# Allegro board fmc_tlu_v1_17.brd
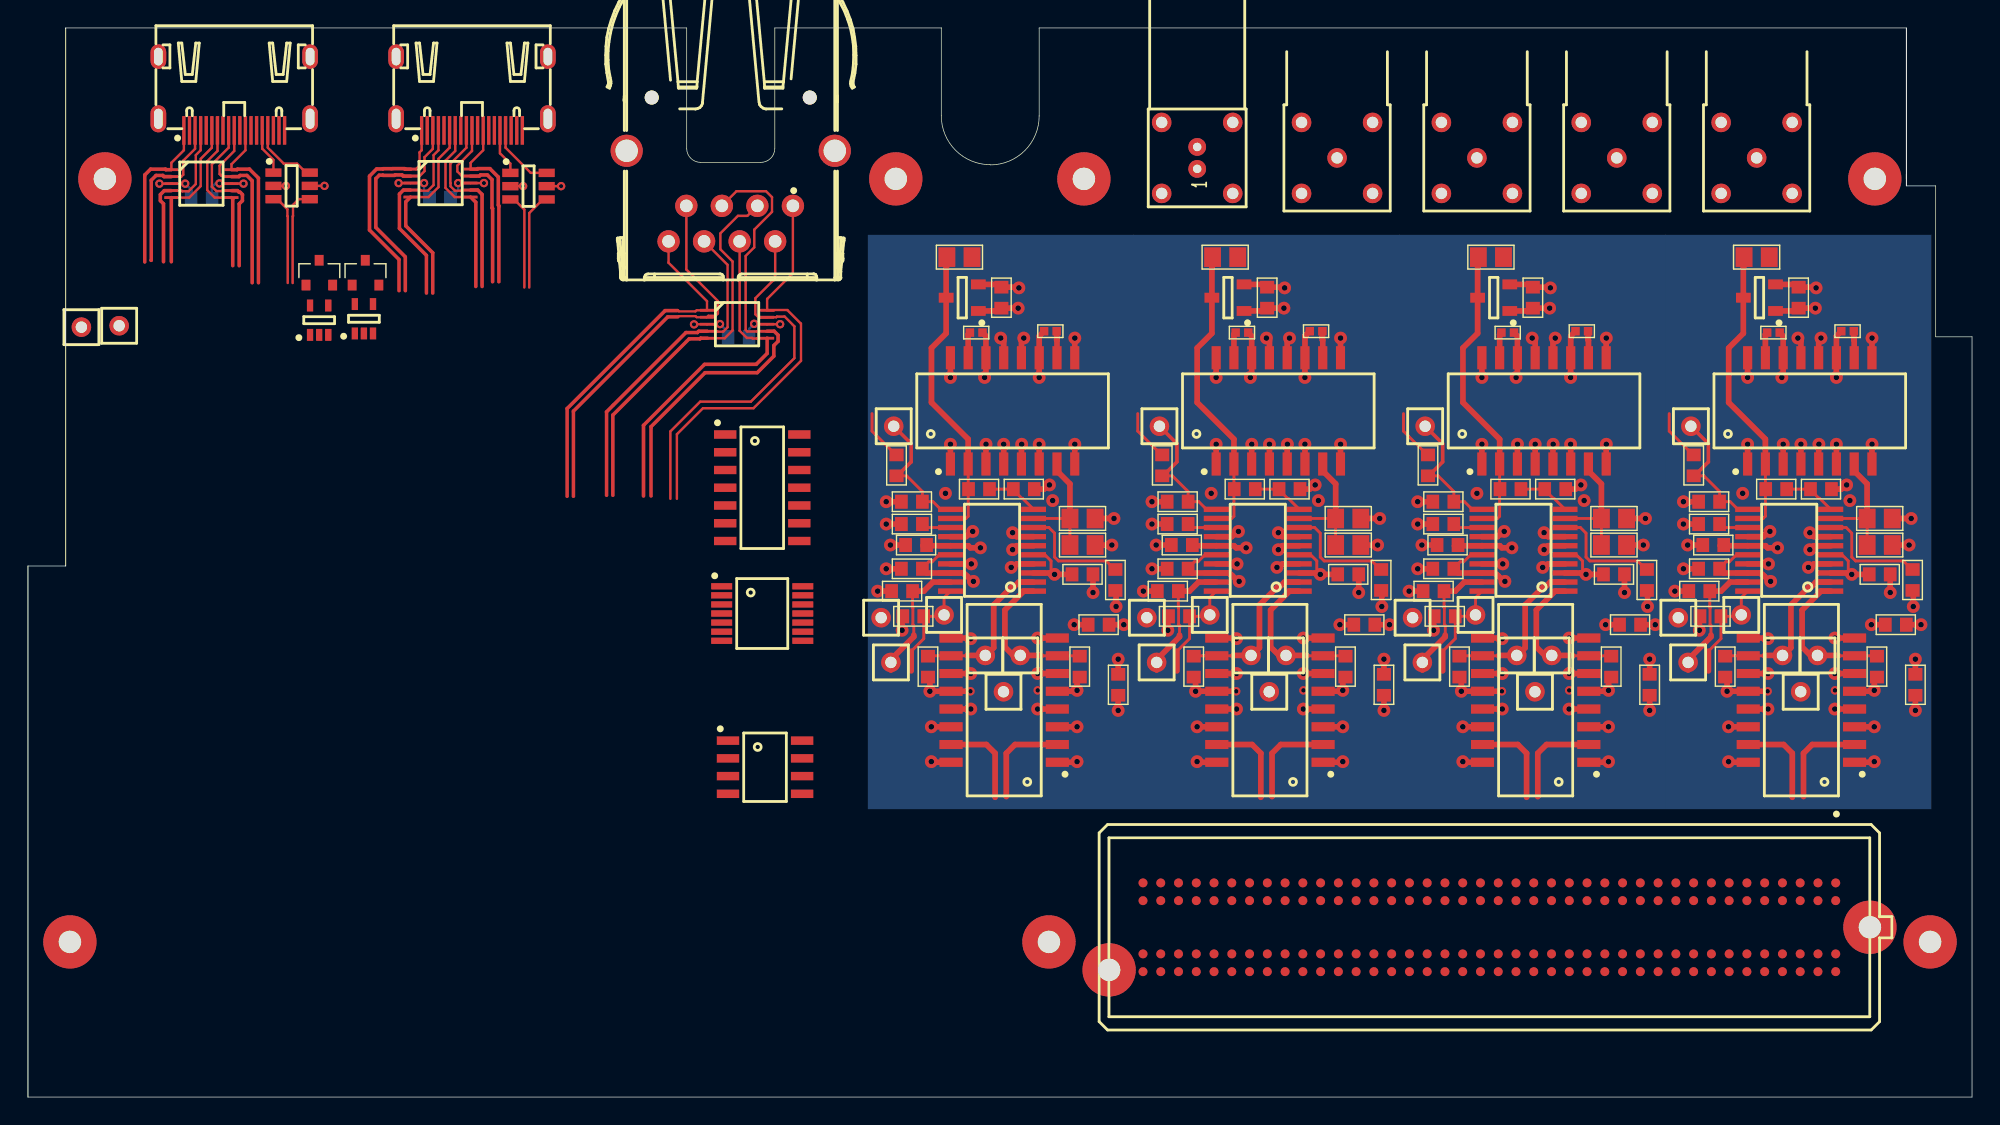
[diagram p0: board, top side]
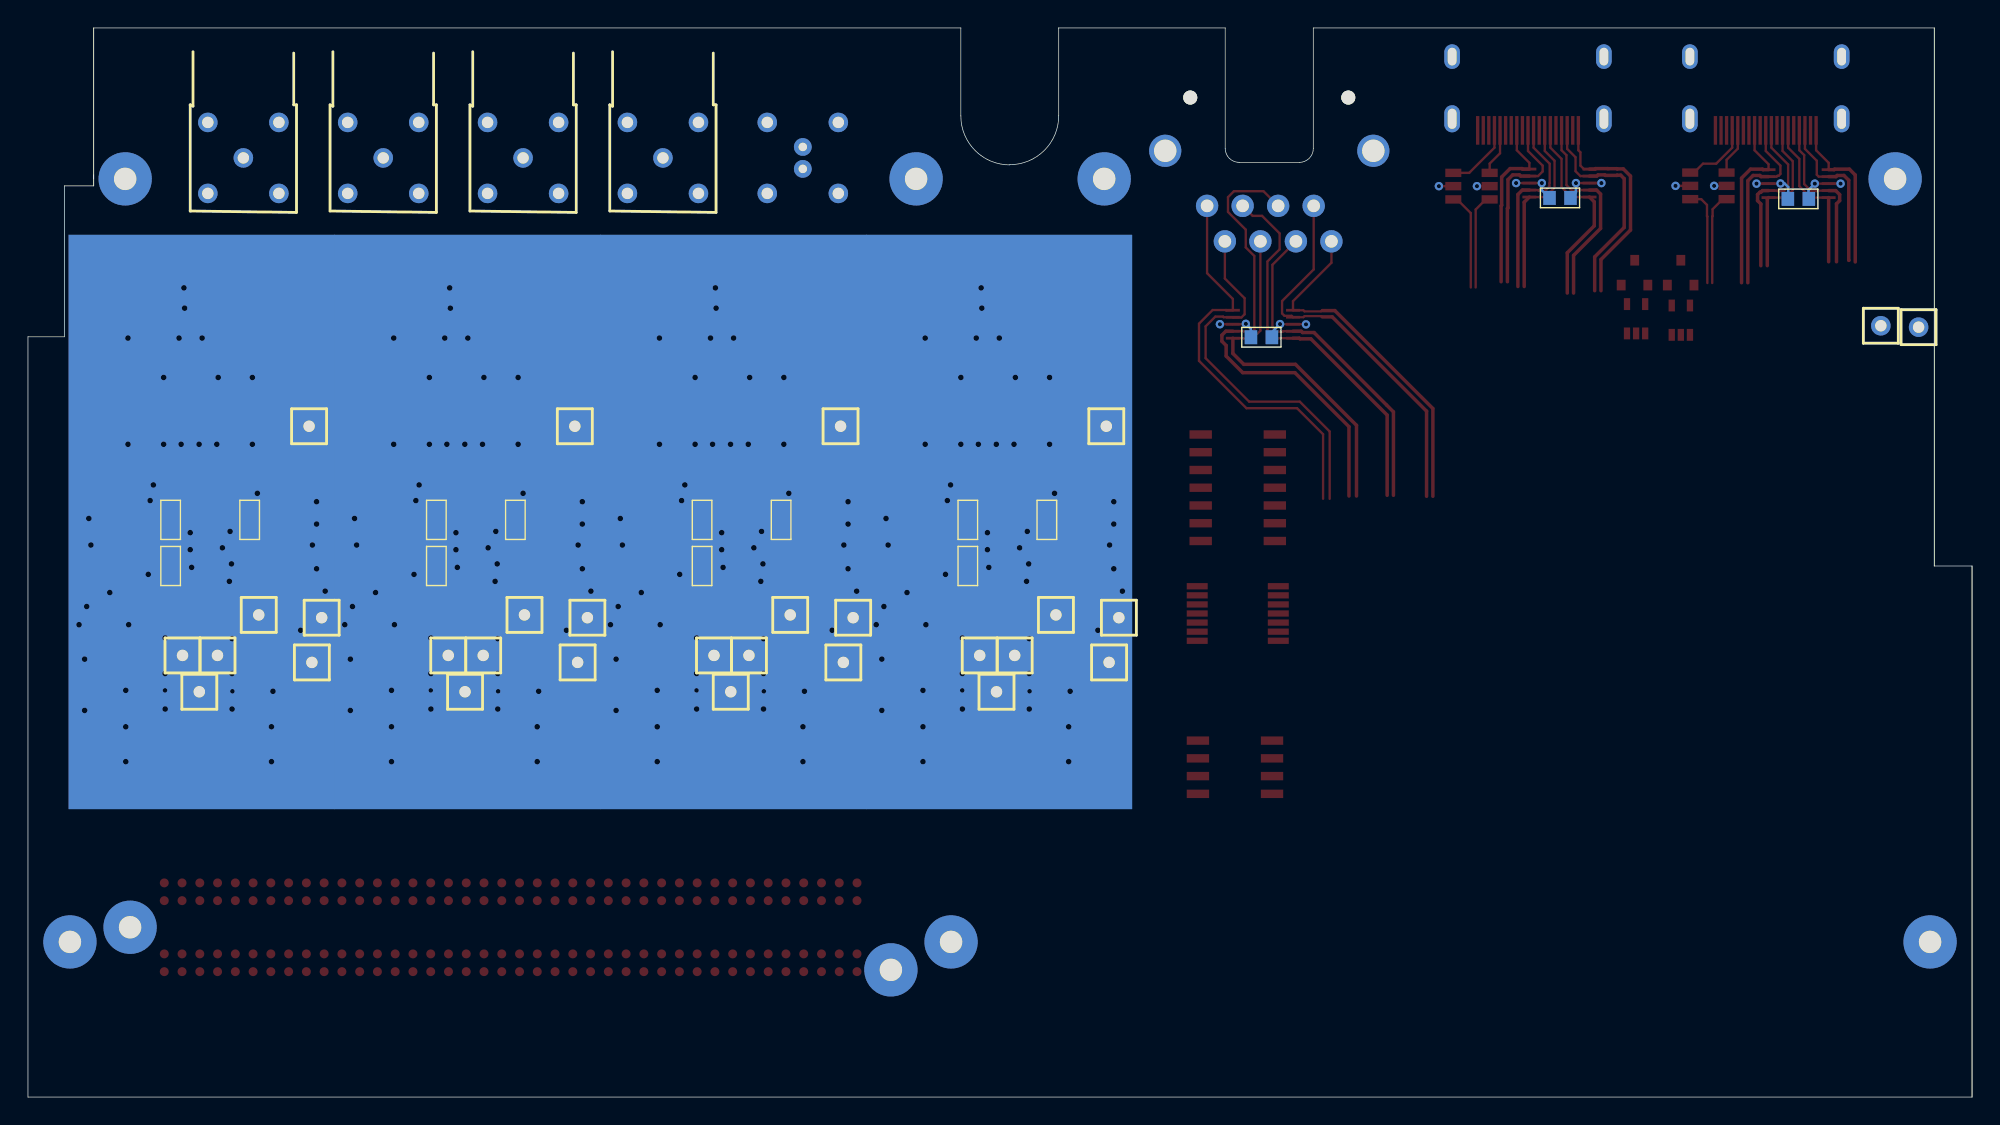
[diagram p1: board, bottom side, seen from below]

Outline 139 x 76.5 mm; copper layers: TOP, LAYER2, LAYER3, LAYER4, LAYER5, BOTTOM. Coordinates in mm from the lower left corner of the outline.
Outline path: 0,38 0,0 ; 0,38 2.7,38 ; 0,38 0,0 ; 0,0 139,0 139,54.4 136.4,54.4 136.4,65.2 134.3,65.2 ; 2.7,38 2.7,76.5 ; 2.7,38 2.7,76.5 ; 2.7,76.5 47.1,76.5 47.1,67.88 arc(47.39,67.17) 48.1,66.88 52.4,66.88 arc(53.1,67.17) 53.4,67.88 53.4,76.5 65.3,76.5 65.3,70.21 arc(66.33,67.74) 68.81,66.72 ; 134.3,76.5 72.3,76.5 72.3,70.2 arc(71.27,67.73) 68.8,66.7 ; 134.3,76.5 134.3,65.7 ; 134.3,76.5 134.3,65.2 ; 134.3,65.2 134.3,66

## Design rules (mm)
constraint set DEFAULT: min track width 0.17, pair gap 0.18
net group BEAM_TRIGGER0: nets BEAM_TRIGGER*<0> BEAM_TRIGGER<0>
net group BEAM_TRIGGER1: nets BEAM_TRIGGER*<1> BEAM_TRIGGER<1>
net group BEAM_TRIGGER2: nets BEAM_TRIGGER*<2> BEAM_TRIGGER<2>
net group BEAM_TRIGGER3: nets BEAM_TRIGGER*<3> BEAM_TRIGGER<3>
net group BEAM_TRIGGER_CFD0: nets BEAM_TRIGGER_CFD*<0> BEAM_TRIGGER_CFD<0>
net group BEAM_TRIGGER_CFD1: nets BEAM_TRIGGER_CFD*<1> BEAM_TRIGGER_CFD<1>
net group BEAM_TRIGGER_CFD2: nets BEAM_TRIGGER_CFD*<2> BEAM_TRIGGER_CFD<2>
net group BEAM_TRIGGER_CFD3: nets BEAM_TRIGGER_CFD*<3> BEAM_TRIGGER_CFD<3>
net group BUSY0: nets BUSY0 BUSY0*
net group BUSY1: nets BUSY1 BUSY1*
net group BUSY2: nets BUSY2 BUSY2*
net group CLK1: nets CLK1 CLK1*
net group CLK2: nets CLK2 CLK2*
net group CONT0: nets CONT0 CONT0*
net group CONT1: nets CONT1 CONT1*
net group CONT2: nets CONT2 CONT2*
net group DP0_C2M: nets DP0_C2M DP0_C2M*
net group DP0_M2C: nets DP0_M2C DP0_M2C*
net group DUT_CLK0: nets DUT_CLK0 DUT_CLK0*
net group FMC_CLK1_M2C: nets FMC_CLK1_M2C FMC_CLK1_M2C*
net group FMC_LA0: nets FMC_LA*<0> FMC_LA<0>
net group FMC_LA1: nets FMC_LA*<1> FMC_LA<1>
net group FMC_LA2: nets FMC_LA*<2> FMC_LA<2>
net group FMC_LA3: nets FMC_LA*<3> FMC_LA<3>
net group FMC_LA4: nets FMC_LA*<4> FMC_LA<4>
net group FMC_LA5: nets FMC_LA*<5> FMC_LA<5>
net group FMC_LA6: nets FMC_LA*<6> FMC_LA<6>
net group FMC_LA7: nets FMC_LA*<7> FMC_LA<7>
net group FMC_LA8: nets FMC_LA*<8> FMC_LA<8>
net group FMC_LA9: nets FMC_LA*<9> FMC_LA<9>
net group FMC_LA10: nets FMC_LA*<10> FMC_LA<10>
net group FMC_LA11: nets FMC_LA*<11> FMC_LA<11>
net group FMC_LA12: nets FMC_LA*<12> FMC_LA<12>
net group FMC_LA13: nets FMC_LA*<13> FMC_LA<13>
net group FMC_LA14: nets FMC_LA*<14> FMC_LA<14>
net group FMC_LA15: nets FMC_LA*<15> FMC_LA<15>
net group FMC_LA16: nets FMC_LA*<16> FMC_LA<16>
net group FMC_LA17: nets FMC_LA*<17> FMC_LA<17>
net group FMC_LA18: nets FMC_LA*<18> FMC_LA<18>
net group FMC_LA19: nets FMC_LA*<19> FMC_LA<19>
net group FMC_LA20: nets FMC_LA*<20> FMC_LA<20>
net group FMC_LA21: nets FMC_LA*<21> FMC_LA<21>
net group FMC_LA22: nets FMC_LA*<22> FMC_LA<22>
net group FMC_LA23: nets FMC_LA*<23> FMC_LA<23>
net group FMC_LA24: nets FMC_LA*<24> FMC_LA<24>
net group FMC_LA25: nets FMC_LA*<25> FMC_LA<25>
net group FMC_LA26: nets FMC_LA*<26> FMC_LA<26>
net group FMC_LA27: nets FMC_LA*<27> FMC_LA<27>
net group FMC_LA28: nets FMC_LA*<28> FMC_LA<28>
net group FMC_LA29: nets FMC_LA*<29> FMC_LA<29>
net group FMC_LA30: nets FMC_LA*<30> FMC_LA<30>
net group FMC_LA31: nets FMC_LA*<31> FMC_LA<31>
net group FMC_LA32: nets FMC_LA*<32> FMC_LA<32>
net group FMC_LA33: nets FMC_LA*<33> FMC_LA<33>
net group GBTCLK0_M2C: nets GBTCLK0_M2C GBTCLK0_M2C*
net group SPARE1: nets SPARE1 SPARE1*
net group SPARE2: nets SPARE2 SPARE2*
net group TRIG0: nets TRIG0 TRIG0*
net group TRIG1: nets TRIG1 TRIG1*
net group TRIG2: nets TRIG2 TRIG2*
net group IN: nets IN<0> IN<1> IN<2> IN<3>
net group VTHRESH: nets VTHRESH<0> VTHRESH<1> VTHRESH<2> VTHRESH<3>

## Placement (name value [footprint] x y rotation side)
C1_1  100nF  [C0603]  69.6 57.2 90 top
C1_2  100nF  [C0603]  88.6 57.2 90 top
C1_3  100nF  [C0603]  107.6 57.2 90 top
C1_4  100nF  [C0603]  126.6 57.2 90 top
C2_1  10nF  [C0603]  63.2 42.6 0 top
C2_2  10nF  [C0603]  82.2 42.6 0 top
C2_3  10nF  [C0603]  101.2 42.6 0 top
C2_4  10nF  [C0603]  120.2 42.6 0 top
C3_1  1.0uF  [C0603]  77.95 29.5 90 top
C3_2  1.0uF  [C0603]  96.95 29.5 90 top
C3_3  1.0uF  [C0603]  115.95 29.5 90 top
C3_4  1.0uF  [C0603]  134.95 29.5 90 top
C4_1  1.0uF  [C0603]  76.55 33.8 0 top
C4_2  1.0uF  [C0603]  95.55 33.8 0 top
C4_3  1.0uF  [C0603]  114.55 33.8 0 top
C4_4  1.0uF  [C0603]  133.55 33.8 0 top
C5_1  100nF  [C0603]  75.4 37.4 180 top
C5_2  100nF  [C0603]  94.4 37.4 180 top
C5_3  100nF  [C0603]  113.4 37.4 180 top
C5_4  100nF  [C0603]  132.4 37.4 180 top
C6_1  1.0uF  [C0603]  63.5 39.5 0 top
C6_2  1.0uF  [C0603]  82.5 39.5 0 top
C6_3  1.0uF  [C0603]  101.5 39.5 0 top
C6_4  1.0uF  [C0603]  120.5 39.5 0 top
C7_1  100nF  [C0603]  71.8 41.3 270 bottom
C7_2  100nF  [C0603]  90.8 41.3 270 bottom
C7_3  100nF  [C0603]  109.8 41.3 270 bottom
C7_4  100nF  [C0603]  128.8 41.3 270 bottom
C8_1  100nF  [C0603]  63.2 37.8 0 top
C8_2  100nF  [C0603]  82.2 37.8 0 top
C8_3  100nF  [C0603]  101.2 37.8 0 top
C8_4  100nF  [C0603]  120.2 37.8 0 top
C9_1  100nF  [C0603]  71.8 38 90 bottom
C9_2  100nF  [C0603]  90.8 38 90 bottom
C9_3  100nF  [C0603]  109.8 38 90 bottom
C9_4  100nF  [C0603]  128.8 38 90 bottom
C10_1  100nF  [C0603]  66.15 41.3 270 bottom
C10_2  100nF  [C0603]  85.15 41.3 270 bottom
C10_3  100nF  [C0603]  104.15 41.3 270 bottom
C10_4  100nF  [C0603]  123.15 41.3 270 bottom
C14  100nF  [C0603]  12.42 64.27 0 bottom
C15  100nF  [C0603]  50.81 54.37 0 bottom
C16  100nF  [C0603]  29.46 64.34 0 bottom
D1_1  -  [SOT95P240X130-3N]  66.8 57.2 180 top
D1_2  -  [SOT95P240X130-3N]  85.8 57.2 180 top
D1_3  -  [SOT95P240X130-3N]  104.8 57.2 180 top
D1_4  -  [SOT95P240X130-3N]  123.8 57.2 180 top
IC1  -  [SOP65P640X120-14N]  52.5 34.6 0 top
IC1_1  -  [SOIC127P835X237-16N]  70.4 49.1 90 top
IC1_2  -  [SOIC127P835X237-16N]  89.4 49.1 90 top
IC1_3  -  [SOIC127P835X237-16N]  108.4 49.1 90 top
IC1_4  -  [SOIC127P835X237-16N]  127.4 49.1 90 top
IC2  -  [SOIC127P600X175-14N]  52.5 43.6 0 top
IC2_1  -  [TSSOP20MA_065]  71.9 36.2 90 top
IC2_2  -  [TSSOP20MA_065]  90.9 36.2 90 top
IC2_3  -  [TSSOP20MA_065]  109.9 36.2 90 top
IC2_4  -  [TSSOP20MA_065]  128.9 36.2 90 top
IC3  -  [SOT95P280X145-6N]  18.85 65.2 0 top
IC3_1  -  [SOIC127P835X237-16N]  69.8 28.4 180 top
IC3_2  -  [SOIC127P835X237-16N]  88.8 28.4 180 top
IC3_3  -  [SOIC127P835X237-16N]  107.8 28.4 180 top
IC3_4  -  [SOIC127P835X237-16N]  126.8 28.4 180 top
IC4  -  [SOT65P210X110-5N]  20.82 55.59 90 top
IC5  -  [SOT95P280X145-6N]  35.79 65.18 0 top
IC6  -  [SOT65P210X110-5N]  24.02 55.69 90 top
IC7  -  [SOIC127P600X175-8N]  52.7 23.6 0 top
J1  -  [SAMTEC_MHDMI-19]  14.75 69.17 0 top
J2  -  [SAMTEC_MHDMI-19]  31.75 69.17 0 top
J3  -  [MOLEX_44661-1011]  50.25 68.86 270 top
J4  -  [SAMTEC_ASP-134606-01]  104.49 12.15 0 top
NOREF  -  [unnamed]  77.3 9.1 0 top
NOREF#2  -  [unnamed]  73 11.1 0 top
NOREF#3  -  [unnamed]  132.05 65.7 0 top
NOREF#4  -  [unnamed]  131.7 12.15 0 top
NOREF#5  -  [unnamed]  5.5 65.7 0 top
NOREF#6  -  [unnamed]  62.05 65.7 0 top
NOREF#7  -  [unnamed]  3 11.1 0 top
NOREF#8  -  [unnamed]  136 11.1 0 top
NOREF#9  -  [unnamed]  75.5 65.7 0 top
PX1  -  [LEMOEPG00_302]  83.6 66.56 90 top
PX2  -  [PLEMO80]  93.6 67.2 90 top
PX3  -  [PLEMO80]  103.6 67.2 90 top
PX4  -  [PLEMO80]  113.6 67.2 90 top
PX5  -  [PLEMO80]  123.6 67.2 90 top
R1_1  51  [C0402]  67.8 54.7 180 top
R1_2  51  [C0402]  86.8 54.7 180 top
R1_3  51  [C0402]  105.8 54.7 180 top
R1_4  51  [C0402]  124.8 54.7 180 top
R2_1  12  [C0805]  66.6 60.1 180 top
R2_2  12  [C0805]  85.6 60.1 180 top
R2_3  12  [C0805]  104.6 60.1 180 top
R2_4  12  [C0805]  123.6 60.1 180 top
R3_1  51  [C0603]  68 43.5 0 top
R3_2  51  [C0603]  87 43.5 0 top
R3_3  51  [C0603]  106 43.5 0 top
R3_4  51  [C0603]  125 43.5 0 top
R4_1  51  [C0402]  73.1 54.8 0 top
R4_2  51  [C0402]  92.1 54.8 0 top
R4_3  51  [C0402]  111.1 54.8 0 top
R4_4  51  [C0402]  130.1 54.8 0 top
R5_1  100  [C0603]  62.1 45.2 270 top
R5_2  100  [C0603]  81.1 45.2 270 top
R5_3  100  [C0603]  100.1 45.2 270 top
R5_4  100  [C0603]  119.1 45.2 270 top
R6_1  100  [C0805]  75.4 41.4 180 top
R6_2  100  [C0805]  94.4 41.4 180 top
R6_3  100  [C0805]  113.4 41.4 180 top
R6_4  100  [C0805]  132.4 41.4 180 top
R7_1  100  [C0603]  71.2 43.5 180 top
R7_2  100  [C0603]  90.2 43.5 180 top
R7_3  100  [C0603]  109.2 43.5 180 top
R7_4  100  [C0603]  128.2 43.5 180 top
R8_1  100  [C0805]  75.4 39.5 180 top
R8_2  100  [C0805]  94.4 39.5 180 top
R8_3  100  [C0805]  113.4 39.5 180 top
R8_4  100  [C0805]  132.4 39.5 180 top
R9_1  33k  [C0603]  63.2 41 0 top
R9_2  33k  [C0603]  82.2 41 0 top
R9_3  33k  [C0603]  101.2 41 0 top
R9_4  33k  [C0603]  120.2 41 0 top
R10_1  XX  [C0603]  77.75 37 90 top
R10_2  XX  [C0603]  96.75 37 90 top
R10_3  XX  [C0603]  115.75 37 90 top
R10_4  XX  [C0603]  134.75 37 90 top
R11_1  75  [C0603]  62.5 36.2 0 top
R11_2  75  [C0603]  81.5 36.2 0 top
R11_3  75  [C0603]  100.5 36.2 0 top
R11_4  75  [C0603]  119.5 36.2 0 top
R12_1  75  [C0603]  64.35 30.8 90 top
R12_2  75  [C0603]  83.35 30.8 90 top
R12_3  75  [C0603]  102.35 30.8 90 top
R12_4  75  [C0603]  121.35 30.8 90 top
R13_1  75  [C0603]  63.3 34.4 0 top
R13_2  75  [C0603]  82.3 34.4 0 top
R13_3  75  [C0603]  101.3 34.4 0 top
R13_4  75  [C0603]  120.3 34.4 0 top
R14_1  75  [C0603]  75.2 30.8 90 top
R14_2  75  [C0603]  94.2 30.8 90 top
R14_3  75  [C0603]  113.2 30.8 90 top
R14_4  75  [C0603]  132.2 30.8 90 top
T1  -  [SOT23]  20.82 58.99 90 top
T2  -  [SOT23]  24.12 58.99 90 top
TP1_1  -  [TP_HOLE_08]  61.9 48 0 top
TP1_2  -  [TP_HOLE_08]  80.9 48 0 top
TP1_3  -  [TP_HOLE_08]  99.9 48 0 top
TP1_4  -  [TP_HOLE_08]  118.9 48 0 top
TP2_1  -  [TP_HOLE_08]  65.5 34.5 0 top
TP2_2  -  [TP_HOLE_08]  84.5 34.5 0 top
TP2_3  -  [TP_HOLE_08]  103.5 34.5 0 top
TP2_4  -  [TP_HOLE_08]  122.5 34.5 0 top
TP3_1  -  [TP_HOLE_08]  61.7 31.1 0 top
TP3_2  -  [TP_HOLE_08]  80.7 31.1 0 top
TP3_3  -  [TP_HOLE_08]  99.7 31.1 0 top
TP3_4  -  [TP_HOLE_08]  118.7 31.1 0 top
TP4_1  -  [TP_HOLE_08]  61 34.3 0 top
TP4_2  -  [TP_HOLE_08]  80 34.3 0 top
TP4_3  -  [TP_HOLE_08]  99 34.3 0 top
TP4_4  -  [TP_HOLE_08]  118 34.3 0 top
TP5_1  -  [TP_HOLE_08]  70.95 31.6 0 top
TP5_2  -  [TP_HOLE_08]  89.95 31.6 0 top
TP5_3  -  [TP_HOLE_08]  108.95 31.6 0 top
TP5_4  -  [TP_HOLE_08]  127.95 31.6 0 top
TP6_1  -  [TP_HOLE_08]  68.45 31.6 0 top
TP6_2  -  [TP_HOLE_08]  87.45 31.6 0 top
TP6_3  -  [TP_HOLE_08]  106.45 31.6 0 top
TP6_4  -  [TP_HOLE_08]  125.45 31.6 0 top
TP7_1  -  [TP_HOLE_08]  69.75 29 0 top
TP7_2  -  [TP_HOLE_08]  88.75 29 0 top
TP7_3  -  [TP_HOLE_08]  107.75 29 0 top
TP7_4  -  [TP_HOLE_08]  126.75 29 0 top
TP11  -  [TP_HOLE_08]  6.52 55.19 0 top
TP12  -  [TP_HOLE_08]  3.82 55.09 0 top
U1  -  [SOT552-1]  12.4 65.36 0 top
U2  -  [SOT552-1]  50.7 55.3 0 top
U3  -  [SOT552-1]  29.5 65.4 0 top

## Library data of the parts
C1_1-C1_4 C5_1-C5_4 C7_1-C7_4 C8_1-C8_4 C9_1-C9_4 C10_1-C10_4 C14-C16 = CAPCERSMDCL2: part number: CAPCERSMDCL2_0603-100NF,16V; tolerance: 10%
C2_1-C2_4 = CAPCERSMDCL2: part number: CAPCERSMDCL2_0603-10NF,50V; tolerance: 10%
C3_1-C3_4 C4_1-C4_4 C6_1-C6_4 = CAPCERSMDCL2: part number: CAPCERSMDCL2_0603-1.0UF,6.3V; tolerance: 10%
D1_1-D1_4 = DIODE_DUAL_SERIES: part number: HBAT-540C
IC1 = AD5665R: part number: AD5665RBRUZ-1
IC1_1-IC1_4 = DELAY_LINE_GL2L: part number: GL2L5LS050D-C
IC2 = OPA4277: part number: OPA4277UA
IC2_1-IC2_4 = MAX9601
IC3 IC5 = USBLC6-2: part number: USBLC6-2SC6
IC3_1-IC3_4 = DELAY_LINE_GL2L: part number: GL2L5LS100D-C
IC4 IC6 = 74LVC1G07: part number: SN74LVC1G07DCK
IC7 = 24AA025E48
J1 J2 = CON19P: part number: MHDMI-19-02-H-TH-L-TR
J3 = CON8P: part number: CON8P-MOLEX_44661-1011
J4 = CON160P_40CDGH: part number: ASP-134606-01
PX1 = PLEMO2CI: part number: PLEMO2CI-PLEMO2-00B
PX2-PX5 = PCOAX: part number: PCOAX-PLEMO00C
R1_1-R1_4 R4_1-R4_4 = RSMD0402: part number: RSMD0402_1/16W-51,1%; tolerance: 1%
R2_1-R2_4 = RSMD0805: part number: RSMD0805_125MW-12,1%; tolerance: 1%
R3_1-R3_4 = RSMD0603: part number: RSMD0603_1/10W-51,1%; tolerance: 1%
R5_1-R5_4 R7_1-R7_4 = RSMD0603: part number: RSMD0603_1/10W-100,1%; tolerance: 1%
R6_1-R6_4 R8_1-R8_4 = RSMD0805: part number: RSMD0805_125MW-100,1%; tolerance: 1%
R9_1-R9_4 = RSMD0603: part number: RSMD0603_1/10W-33K,1%; tolerance: 1%
R10_1-R10_4 = RSMD0603: part number: RSMD0603_1/10W-XX,1%; tolerance: 1%
R11_1-R11_4 R12_1-R12_4 R13_1-R13_4 R14_1-R14_4 = RSMD0603: part number: RSMD0603_1/10W-75,1%; tolerance: 1%
T1 T2 = TRANS MOSFET: part number: TRANS MOSFET_GSD-FDV301N,SOT23
TP1_1-TP1_4 TP2_1-TP2_4 TP3_1-TP3_4 TP4_1-TP4_4 TP5_1-TP5_4 TP6_1-TP6_4 TP7_1-TP7_4 TP11 TP12 = TP: part number: TP_HOLE-0.8MM
U1-U3 = PRTR5V0U8S: part number: PRTR5V0U8S_TSSOP-NXP

## Footprints (pads in the part's own frame, mm; a bottom-side part is the same pattern mirrored in y, then rotated)
C0402
  rect 0.6x0.6 smd: 1(-0.45,0) 2(0.45,0)
C0603
  rect 0.9x1 smd: 1(-0.75,0) 2(0.75,0)
C0805
  rect 1.2x1.4 smd: 1(-0.9,0) 2(0.9,0)
LEMOEPG00_302
  round 1.27 hole 0.6: 1(-0.15,0) 2(1.42,0)
  round 1.397 hole 0.813: 3(-1.905,-2.54) 4(3.175,-2.54) 5(3.175,2.54) 6(-1.905,2.54)
MOLEX_44661-1011
  round 1 hole 3.25 unplated: (-2.66,5.65) (-2.66,-5.65)
  round 1.6 hole 0.9: 1(5.09,4.445) 2(7.63,3.175) 3(5.09,1.905) 4(7.63,0.635) 5(5.09,-0.635) 6(7.63,-1.905) 7(5.09,-3.175) 8(7.63,-4.445)
  round 2.301 hole 1.6: 9(1.15,7.44) 10(1.15,-7.44)
PLEMO80
  round 1.397 hole 0.813: 1(0,0) 2(2.54,-2.54) 3(2.54,2.54) 4(-2.54,2.54) 5(-2.54,-2.54)
SAMTEC_ASP-134606-01
  round 1.001 hole 1.3 unplated: (-27.19,-3.05) (27.19,0)
  round 0.64 smd: C1(24.765,3.175) C2(23.495,3.175) C3(22.225,3.175) C4(20.955,3.175) C5(19.685,3.175) C6(18.415,3.175) C7(17.145,3.175) C8(15.875,3.175) C9(14.605,3.175) C10(13.335,3.175) C11(12.065,3.175) C12(10.795,3.175) C13(9.525,3.175) C14(8.255,3.175) C15(6.985,3.175) C16(5.715,3.175) C17(4.445,3.175) C18(3.175,3.175) C19(1.905,3.175) C20(0.635,3.175) C21(-0.635,3.175) C22(-1.905,3.175) C23(-3.175,3.175) C24(-4.445,3.175) C25(-5.715,3.175) C26(-6.985,3.175) C27(-8.255,3.175) C28(-9.525,3.175) C29(-10.795,3.175) C30(-12.065,3.175) C31(-13.335,3.175) C32(-14.605,3.175) C33(-15.875,3.175) C34(-17.145,3.175) C35(-18.415,3.175) C36(-19.685,3.175) C37(-20.955,3.175) C38(-22.225,3.175) C39(-23.495,3.175) C40(-24.765,3.175) D1(24.765,1.905) D2(23.495,1.905) D3(22.225,1.905) D4(20.955,1.905) D5(19.685,1.905) D6(18.415,1.905) D7(17.145,1.905) D8(15.875,1.905) D9(14.605,1.905) D10(13.335,1.905) D11(12.065,1.905) D12(10.795,1.905) D13(9.525,1.905) D14(8.255,1.905) D15(6.985,1.905) D16(5.715,1.905) D17(4.445,1.905) D18(3.175,1.905) D19(1.905,1.905) D20(0.635,1.905) D21(-0.635,1.905) D22(-1.905,1.905) D23(-3.175,1.905) D24(-4.445,1.905) D25(-5.715,1.905) D26(-6.985,1.905) D27(-8.255,1.905) D28(-9.525,1.905) D29(-10.795,1.905) D30(-12.065,1.905) D31(-13.335,1.905) D32(-14.605,1.905) D33(-15.875,1.905) D34(-17.145,1.905) D35(-18.415,1.905) D36(-19.685,1.905) D37(-20.955,1.905) D38(-22.225,1.905) D39(-23.495,1.905) D40(-24.765,1.905) G1(24.765,-1.905) G2(23.495,-1.905) G3(22.225,-1.905) G4(20.955,-1.905) G5(19.685,-1.905) G6(18.415,-1.905) G7(17.145,-1.905) G8(15.875,-1.905) G9(14.605,-1.905) G10(13.335,-1.905) G11(12.065,-1.905) G12(10.795,-1.905) G13(9.525,-1.905) G14(8.255,-1.905) G15(6.985,-1.905) G16(5.715,-1.905) G17(4.445,-1.905) G18(3.175,-1.905) G19(1.905,-1.905) G20(0.635,-1.905) G21(-0.635,-1.905) G22(-1.905,-1.905) G23(-3.175,-1.905) G24(-4.445,-1.905) G25(-5.715,-1.905) G26(-6.985,-1.905) G27(-8.255,-1.905) G28(-9.525,-1.905) G29(-10.795,-1.905) G30(-12.065,-1.905) G31(-13.335,-1.905) G32(-14.605,-1.905) G33(-15.875,-1.905) G34(-17.145,-1.905) G35(-18.415,-1.905) G36(-19.685,-1.905) G37(-20.955,-1.905) G38(-22.225,-1.905) G39(-23.495,-1.905) G40(-24.765,-1.905) H1(24.765,-3.175) H2(23.495,-3.175) H3(22.225,-3.175) H4(20.955,-3.175) H5(19.685,-3.175) H6(18.415,-3.175) H7(17.145,-3.175) H8(15.875,-3.175) H9(14.605,-3.175) H10(13.335,-3.175) H11(12.065,-3.175) H12(10.795,-3.175) H13(9.525,-3.175) H14(8.255,-3.175) H15(6.985,-3.175) H16(5.715,-3.175) H17(4.445,-3.175) H18(3.175,-3.175) H19(1.905,-3.175) H20(0.635,-3.175) H21(-0.635,-3.175) H22(-1.905,-3.175) H23(-3.175,-3.175) H24(-4.445,-3.175) H25(-5.715,-3.175) H26(-6.985,-3.175) H27(-8.255,-3.175) H28(-9.525,-3.175) H29(-10.795,-3.175) H30(-12.065,-3.175) H31(-13.335,-3.175) H32(-14.605,-3.175) H33(-15.875,-3.175) H34(-17.145,-3.175) H35(-18.415,-3.175) H36(-19.685,-3.175) H37(-20.955,-3.175) H38(-22.225,-3.175) H39(-23.495,-3.175) H40(-24.765,-3.175)
SAMTEC_MHDMI-19
  rect 0.24x2.05 smd: 1(-3.6,0) 2(-3.2,0) 3(-2.8,0) 4(-2.4,0) 5(-2,0) 6(-1.6,0) 7(-1.2,0) 8(-0.8,0) 9(-0.4,0) 10(0,0) 11(0.4,0) 12(0.8,0) 13(1.2,0) 14(1.6,0) 15(2,0) 16(2.4,0) 17(2.8,0) 18(3.2,0) 19(3.6,0)
  oval 1.12x1.94 hole 0.62x1.44: 20(-5.425,0.83) 21(5.425,0.83)
  oval 1.12x1.76 hole 0.62x1.26: 22(-5.425,5.28) 23(5.425,5.28)
SOIC127P600X175-8N
  rect 1.6x0.6 smd: 1(-2.65,1.905) 2(-2.65,0.635) 3(-2.65,-0.635) 4(-2.65,-1.905) 5(2.65,-1.905) 6(2.65,-0.635) 7(2.65,0.635) 8(2.65,1.905)
SOIC127P600X175-14N
  rect 1.6x0.6 smd: 1(-2.65,3.81) 2(-2.65,2.54) 3(-2.65,1.27) 4(-2.65,0) 5(-2.65,-1.27) 6(-2.65,-2.54) 7(-2.65,-3.81) 8(2.65,-3.81) 9(2.65,-2.54) 10(2.65,-1.27) 11(2.65,0) 12(2.65,1.27) 13(2.65,2.54) 14(2.65,3.81)
SOIC127P835X237-16N
  rect 1.65x0.65 smd: 1(-3.8,4.445) 2(-3.8,3.175) 3(-3.8,1.905) 4(-3.8,0.635) 5(-3.8,-0.635) 6(-3.8,-1.905) 7(-3.8,-3.175) 8(-3.8,-4.445) 9(3.8,-4.445) 10(3.8,-3.175) 11(3.8,-1.905) 12(3.8,-0.635) 13(3.8,0.635) 14(3.8,1.905) 15(3.8,3.175) 16(3.8,4.445)
SOP65P640X120-14N
  rect 1.5x0.45 smd: 1(-2.9,1.95) 2(-2.9,1.3) 3(-2.9,0.65) 4(-2.9,0) 5(-2.9,-0.65) 6(-2.9,-1.3) 7(-2.9,-1.95) 8(2.9,-1.95) 9(2.9,-1.3) 10(2.9,-0.65) 11(2.9,0) 12(2.9,0.65) 13(2.9,1.3) 14(2.9,1.95)
SOT23
  rect 0.762x0.635 smd: 1(-0.889,0.94) 2(-0.889,-0.965) 3(0.889,0)
SOT65P210X110-5N
  rect 0.85x0.45 smd: 1(-1.05,0.65) 2(-1.05,0) 3(-1.05,-0.65) 4(1.05,-0.65) 5(1.05,0.65)
SOT95P240X130-3N
  rect 1.05x0.7 smd: 1(-1.15,0.95) 2(-1.15,-0.95) 3(1.15,0)
SOT95P280X145-6N
  rect 1.15x0.6 smd: 1(-1.3,0.95) 2(-1.3,0) 3(-1.3,-0.95) 4(1.3,-0.95) 5(1.3,0) 6(1.3,0.95)
SOT552-1
  rect 1x0.2 smd: 1(-2.15,1) 2(-2.15,0.5) 3(-2.15,0) 4(-2.15,-0.5) 5(-2.15,-1) 6(2.15,-1) 7(2.15,-0.5) 8(2.15,0) 9(2.15,0.5) 10(2.15,1)
TP_HOLE_08
  round 1.397 hole 0.813: 1(0,0)
TSSOP20MA_065
  rect 0.381x1.778 smd: 1(0,0) 2(0.65,0) 3(1.3,0) 4(1.95,0) 5(2.6,0) 6(3.25,0) 7(3.9,0) 8(4.55,0) 9(5.2,0) 10(5.85,0) 11(5.85,5.94) 12(5.2,5.94) 13(4.55,5.94) 14(3.9,5.94) 15(3.25,5.94) 16(2.6,5.94) 17(1.95,5.94) 18(1.3,5.94) 19(0.65,5.94) 20(0,5.94)
unnamed
  round 3.81 hole 1.6: (0,0)

## Nets
GND_HDMI1: J1.20 J1.21 J1.22 J1.23
GND_HDMI2: J2.20 J2.21 J2.22 J2.23
GND_SIGNAL: C2_1.1(A<0>) C2_2.1(A<0>) C2_3.1(A<0>) C2_4.1(A<0>) C3_1.1(A<0>) C3_2.1(A<0>) C3_3.1(A<0>) C3_4.1(A<0>) C4_1.1(A<0>) C4_2.1(A<0>) C4_3.1(A<0>) C4_4.1(A<0>) C5_1.1(A<0>) C5_2.1(A<0>) C5_3.1(A<0>) C5_4.1(A<0>) C6_1.1(A<0>) C6_2.1(A<0>) C6_3.1(A<0>) C6_4.1(A<0>) C7_1.1(A<0>) C7_2.1(A<0>) C7_3.1(A<0>) C7_4.1(A<0>) C8_1.1(A<0>) C8_2.1(A<0>) C8_3.1(A<0>) C8_4.1(A<0>) C9_1.1(A<0>) C9_2.1(A<0>) C9_3.1(A<0>) C9_4.1(A<0>) C10_1.1(A<0>) C10_2.1(A<0>) C10_3.1(A<0>) C10_4.1(A<0>) C14.1(A<0>) C15.1(A<0>) C16.1(A<0>) IC1.1(LDAC*) IC1.2(ADDR1) IC1.8(ADDR2) IC1.12 IC1_1.1(SH<0>) IC1_1.3(SH<1>) IC1_1.4(SH<2>) IC1_1.5(SH<3>) IC1_1.6(SH<4>) IC1_1.8(SH<5>) IC1_1.9(SH<6>) IC1_1.11(SH<7>) IC1_1.12(SH<8>) IC1_1.13(SH<9>) IC1_1.14(SH<10>) IC1_1.16(SH<11>) IC1_2.1(SH<0>) IC1_2.3(SH<1>) IC1_2.4(SH<2>) IC1_2.5(SH<3>) IC1_2.6(SH<4>) IC1_2.8(SH<5>) IC1_2.9(SH<6>) IC1_2.11(SH<7>) IC1_2.12(SH<8>) IC1_2.13(SH<9>) IC1_2.14(SH<10>) IC1_2.16(SH<11>) IC1_3.1(SH<0>) IC1_3.3(SH<1>) IC1_3.4(SH<2>) IC1_3.5(SH<3>) IC1_3.6(SH<4>) IC1_3.8(SH<5>) IC1_3.9(SH<6>) IC1_3.11(SH<7>) IC1_3.12(SH<8>) IC1_3.13(SH<9>) IC1_3.14(SH<10>) IC1_3.16(SH<11>) IC1_4.1(SH<0>) IC1_4.3(SH<1>) IC1_4.4(SH<2>) IC1_4.5(SH<3>) IC1_4.6(SH<4>) IC1_4.8(SH<5>) IC1_4.9(SH<6>) IC1_4.11(SH<7>) IC1_4.12(SH<8>) IC1_4.13(SH<9>) IC1_4.14(SH<10>) IC1_4.16(SH<11>) IC2_1.4(LE<0>) IC2_1.17(LE<0>) IC2_2.4(LE<0>) IC2_2.17(LE<0>) IC2_3.4(LE<0>) IC2_3.17(LE<0>) IC2_4.4(LE<0>) IC2_4.17(LE<0>) IC3.2(GND) IC3_1.1(SH<0>) IC3_1.3(SH<1>) IC3_1.4(SH<2>) IC3_1.5(SH<3>) IC3_1.6(SH<4>) IC3_1.8(SH<5>) IC3_1.9(SH<6>) IC3_1.11(SH<7>) IC3_1.12(SH<8>) IC3_1.13(SH<9>) IC3_1.14(SH<10>) IC3_1.16(SH<11>) IC3_2.1(SH<0>) IC3_2.3(SH<1>) IC3_2.4(SH<2>) IC3_2.5(SH<3>) IC3_2.6(SH<4>) IC3_2.8(SH<5>) IC3_2.9(SH<6>) IC3_2.11(SH<7>) IC3_2.12(SH<8>) IC3_2.13(SH<9>) IC3_2.14(SH<10>) IC3_2.16(SH<11>) IC3_3.1(SH<0>) IC3_3.3(SH<1>) IC3_3.4(SH<2>) IC3_3.5(SH<3>) IC3_3.6(SH<4>) IC3_3.8(SH<5>) IC3_3.9(SH<6>) IC3_3.11(SH<7>) IC3_3.12(SH<8>) IC3_3.13(SH<9>) IC3_3.14(SH<10>) IC3_3.16(SH<11>) IC3_4.1(SH<0>) IC3_4.3(SH<1>) IC3_4.4(SH<2>) IC3_4.5(SH<3>) IC3_4.6(SH<4>) IC3_4.8(SH<5>) IC3_4.9(SH<6>) IC3_4.11(SH<7>) IC3_4.12(SH<8>) IC3_4.13(SH<9>) IC3_4.14(SH<10>) IC3_4.16(SH<11>) IC4.3 IC5.2(GND) IC6.3 IC7.4(VSS) J1.2(A<1>) J1.5(A<4>) J1.8(A<7>) J1.11(A<10>) J1.17(A<16>) J2.2(A<1>) J2.5(A<4>) J2.8(A<7>) J2.11(A<10>) J2.17(A<16>) J4.C1(C<1>) J4.C4(C<4>) J4.C5(C<5>) J4.C8(C<8>) J4.C9(C<9>) J4.C12(C<12>) J4.C13(C<13>) J4.C16(C<16>) J4.C17(C<17>) J4.C20(C<20>) J4.C21(C<21>) J4.C24(C<24>) J4.C25(C<25>) J4.C28(C<28>) J4.C29(C<29>) J4.C32(C<32>) J4.C33(C<33>) J4.C36(C<36>) J4.C38(C<38>) J4.C40(C<40>) J4.D2(D<2>) J4.D3(D<3>) J4.D6(D<6>) J4.D7(D<7>) J4.D10(D<10>) J4.D13(D<13>) J4.D16(D<16>) J4.D19(D<19>) J4.D22(D<22>) J4.D25(D<25>) J4.D28(D<28>) J4.D37(D<37>) J4.D39(D<39>) J4.G1(G<1>) J4.G4(G<4>) J4.G5(G<5>) J4.G8(G<8>) J4.G11(G<11>) J4.G14(G<14>) J4.G17(G<17>) J4.G20(G<20>) J4.G23(G<23>) J4.G26(G<26>) J4.G29(G<29>) J4.G32(G<32>) J4.G35(G<35>) J4.G38(G<38>) J4.G40(G<40>) J4.H3(H<3>) J4.H6(H<6>) J4.H9(H<9>) J4.H12(H<12>) J4.H15(H<15>) J4.H18(H<18>) J4.H21(H<21>) J4.H24(H<24>) J4.H27(H<27>) J4.H30(H<30>) J4.H33(H<33>) J4.H36(H<36>) J4.H39(H<39>) PX1.3 PX1.4 PX1.5 PX1.6 PX2.2 PX2.3 PX2.4 PX2.5 PX3.2 PX3.3 PX3.4 PX3.5 PX4.2 PX4.3 PX4.4 PX4.5 PX5.2 PX5.3 PX5.4 PX5.5 R1_1.1(A<0>) R1_2.1(A<0>) R1_3.1(A<0>) R1_4.1(A<0>) R4_1.1(A<0>) R4_2.1(A<0>) R4_3.1(A<0>) R4_4.1(A<0>) R6_1.1(A<0>) R6_2.1(A<0>) R6_3.1(A<0>) R6_4.1(A<0>) R7_1.1(A<0>) R7_2.1(A<0>) R7_3.1(A<0>) R7_4.1(A<0>) R8_1.1(A<0>) R8_2.1(A<0>) R8_3.1(A<0>) R8_4.1(A<0>) R9_1.1(A<0>) R9_2.1(A<0>) R9_3.1(A<0>) R9_4.1(A<0>) R10_1.1(A<0>) R10_2.1(A<0>) R10_3.1(A<0>) R10_4.1(A<0>) R11_1.1(A<0>) R11_2.1(A<0>) R11_3.1(A<0>) R11_4.1(A<0>) R12_1.1(A<0>) R12_2.1(A<0>) R12_3.1(A<0>) R12_4.1(A<0>) R13_1.1(A<0>) R13_2.1(A<0>) R13_3.1(A<0>) R13_4.1(A<0>) R14_1.1(A<0>) R14_2.1(A<0>) R14_3.1(A<0>) R14_4.1(A<0>) TP4_1.1(A<0>) TP4_2.1(A<0>) TP4_3.1(A<0>) TP4_4.1(A<0>) TP7_1.1(A<0>) TP7_2.1(A<0>) TP7_3.1(A<0>) TP7_4.1(A<0>) U1.3 U2.3 U3.3
P2V5: C3_1.2(B<0>) C3_2.2(B<0>) C3_3.2(B<0>) C3_4.2(B<0>) C5_1.2(B<0>) C5_2.2(B<0>) C5_3.2(B<0>) C5_4.2(B<0>) C8_1.2(B<0>) C8_2.2(B<0>) C8_3.2(B<0>) C8_4.2(B<0>) C14.2(B<0>) C15.2(B<0>) C16.2(B<0>) IC2_1.3(VCCO_<0>) IC2_1.5(LE*<0>) IC2_1.16(LE*<0>) IC2_1.18(VCCO_<1>) IC2_2.3(VCCO_<0>) IC2_2.5(LE*<0>) IC2_2.16(LE*<0>) IC2_2.18(VCCO_<1>) IC2_3.3(VCCO_<0>) IC2_3.5(LE*<0>) IC2_3.16(LE*<0>) IC2_3.18(VCCO_<1>) IC2_4.3(VCCO_<0>) IC2_4.5(LE*<0>) IC2_4.16(LE*<0>) IC2_4.18(VCCO_<1>) IC3.5(VBUS) IC4.5 IC5.5(VBUS) IC6.5 J4.G39(G<39>) J4.H40(H<40>) U1.8 U2.8 U3.8
P3V3: IC1.3 IC1.6(POR) IC1.9(CLR*) IC7.8(VCC) J4.C39(C<39>) J4.D32(D<32>) J4.D36(D<36>) J4.D38(D<38>) J4.D40(D<40>) T1.3(D) T2.3(D)
P5V: C1_1.2(B<0>) C1_2.2(B<0>) C1_3.2(B<0>) C1_4.2(B<0>) C4_1.2(B<0>) C4_2.2(B<0>) C4_3.2(B<0>) C4_4.2(B<0>) C7_1.2(B<0>) C7_2.2(B<0>) C7_3.2(B<0>) C7_4.2(B<0>) C10_1.2(B<0>) C10_2.2(B<0>) C10_3.2(B<0>) C10_4.2(B<0>) D1_1.2(C) D1_2.2(C) D1_3.2(C) D1_4.2(C) IC2.4(V+) IC2_1.7(VCC<0>) IC2_1.14(VCC<1>) IC2_2.7(VCC<0>) IC2_2.14(VCC<1>) IC2_3.7(VCC<0>) IC2_3.14(VCC<1>) IC2_4.7(VCC<0>) IC2_4.14(VCC<1>)
P12V: J4.C35(C<35>) J4.C37(C<37>)
BEAM_TRIGGER*<0>: IC2_4.19(Q*<0>) R11_4.2(B<0>) TP3_4.1(A<0>)
BEAM_TRIGGER*<1>: IC2_3.19(Q*<0>) R11_3.2(B<0>) TP3_3.1(A<0>)
BEAM_TRIGGER*<2>: IC2_2.19(Q*<0>) R11_2.2(B<0>) TP3_2.1(A<0>)
BEAM_TRIGGER*<3>: IC2_1.19(Q*<0>) R11_1.2(B<0>) TP3_1.1(A<0>)
BEAM_TRIGGER<0>: IC2_4.20(Q<0>) R13_4.2(B<0>) TP2_4.1(A<0>)
BEAM_TRIGGER<1>: IC2_3.20(Q<0>) R13_3.2(B<0>) TP2_3.1(A<0>)
BEAM_TRIGGER<2>: IC2_2.20(Q<0>) R13_2.2(B<0>) TP2_2.1(A<0>)
BEAM_TRIGGER<3>: IC2_1.20(Q<0>) R13_1.2(B<0>) TP2_1.1(A<0>)
BEAM_TRIGGER_CFD*<0>: IC3_4.15(A2)
BEAM_TRIGGER_CFD*<1>: IC3_3.15(A2)
BEAM_TRIGGER_CFD*<2>: IC3_2.15(A2)
BEAM_TRIGGER_CFD*<3>: IC3_1.15(A2)
BEAM_TRIGGER_CFD<0>: IC3_4.2(A1)
BEAM_TRIGGER_CFD<1>: IC3_3.2(A1)
BEAM_TRIGGER_CFD<2>: IC3_2.2(A1)
BEAM_TRIGGER_CFD<3>: IC3_1.2(A1)
BUSY0: J3.6(A<5>) U2.4(IN)
BUSY0*: J3.3(A<2>) U2.5(IN)
BUSY1: J1.7(A<6>) U1.6(IN)
BUSY1*: J1.9(A<8>) U1.7(IN)
BUSY2: J2.7(A<6>) U3.6(IN)
BUSY2*: J2.9(A<8>) U3.7(IN)
CLK1: J1.3(A<2>) U1.2(IN)
CLK1*: J1.1(A<0>) U1.1(IN)
CLK2: J2.3(A<2>) U3.2(IN)
CLK2*: J2.1(A<0>) U3.1(IN)
CONT0: J3.5(A<4>) U2.7(IN)
CONT0*: J3.4(A<3>) U2.6(IN)
CONT1: J1.4(A<3>) U1.4(IN)
CONT1*: J1.6(A<5>) U1.5(IN)
CONT2: J2.4(A<3>) U3.4(IN)
CONT2*: J2.6(A<5>) U3.5(IN)
DP0_C2M: J4.C2(C<2>)
DP0_C2M*: J4.C3(C<3>)
DP0_M2C: J4.C6(C<6>)
DP0_M2C*: J4.C7(C<7>)
DUT_CLK0: J3.2(A<1>) U2.9(IN)
DUT_CLK0*: J3.1(A<0>) U2.10(IN)
FMC_CLK1_M2C: J4.G2(G<2>)
FMC_CLK1_M2C*: J4.G3(G<3>)
FMC_LA*<0>: J4.G7(G<7>)
FMC_LA*<1>: J4.D9(D<9>)
FMC_LA*<2>: J4.H8(H<8>)
FMC_LA*<3>: J4.G10(G<10>)
FMC_LA*<4>: J4.H11(H<11>)
FMC_LA*<5>: J4.D12(D<12>)
FMC_LA*<6>: J4.C11(C<11>)
FMC_LA*<7>: J4.H14(H<14>)
FMC_LA*<8>: J4.G13(G<13>)
FMC_LA*<9>: J4.D15(D<15>)
FMC_LA*<10>: J4.C15(C<15>)
FMC_LA*<11>: J4.H17(H<17>)
FMC_LA*<12>: J4.G16(G<16>)
FMC_LA*<13>: J4.D18(D<18>)
FMC_LA*<14>: J4.C19(C<19>)
FMC_LA*<15>: J4.H20(H<20>)
FMC_LA*<16>: J4.G19(G<19>)
FMC_LA*<17>: J4.D21(D<21>)
FMC_LA*<18>: J4.C23(C<23>)
FMC_LA*<19>: J4.H23(H<23>)
FMC_LA*<20>: J4.G22(G<22>)
FMC_LA*<21>: J4.H26(H<26>)
FMC_LA*<22>: J4.G25(G<25>)
FMC_LA*<23>: J4.D24(D<24>)
FMC_LA*<24>: J4.H29(H<29>)
FMC_LA*<25>: J4.G28(G<28>)
FMC_LA*<26>: J4.D27(D<27>)
FMC_LA*<27>: J4.C27(C<27>)
FMC_LA*<28>: J4.H32(H<32>)
FMC_LA*<29>: J4.G31(G<31>)
FMC_LA*<30>: J4.H35(H<35>)
FMC_LA*<31>: J4.G34(G<34>)
FMC_LA*<32>: J4.H38(H<38>)
FMC_LA*<33>: J4.G37(G<37>)
FMC_LA<0>: J4.G6(G<6>)
FMC_LA<1>: J4.D8(D<8>)
FMC_LA<2>: J4.H7(H<7>)
FMC_LA<3>: J4.G9(G<9>)
FMC_LA<4>: J4.H10(H<10>)
FMC_LA<5>: J4.D11(D<11>)
FMC_LA<6>: J4.C10(C<10>)
FMC_LA<7>: J4.H13(H<13>)
FMC_LA<8>: J4.G12(G<12>)
FMC_LA<9>: J4.D14(D<14>)
FMC_LA<10>: J4.C14(C<14>)
FMC_LA<11>: J4.H16(H<16>)
FMC_LA<12>: J4.G15(G<15>)
FMC_LA<13>: J4.D17(D<17>)
FMC_LA<14>: J4.C18(C<18>)
FMC_LA<15>: J4.H19(H<19>)
FMC_LA<16>: J4.G18(G<18>)
FMC_LA<17>: J4.D20(D<20>)
FMC_LA<18>: J4.C22(C<22>)
FMC_LA<19>: J4.H22(H<22>)
FMC_LA<20>: J4.G21(G<21>)
FMC_LA<21>: J4.H25(H<25>)
FMC_LA<22>: J4.G24(G<24>)
FMC_LA<23>: J4.D23(D<23>)
FMC_LA<24>: J4.H28(H<28>)
FMC_LA<25>: J4.G27(G<27>)
FMC_LA<26>: J4.D26(D<26>)
FMC_LA<27>: J4.C26(C<26>)
FMC_LA<28>: J4.H31(H<31>)
FMC_LA<29>: J4.G30(G<30>)
FMC_LA<30>: J4.H34(H<34>)
FMC_LA<31>: J4.G33(G<33>)
FMC_LA<32>: J4.H37(H<37>)
FMC_LA<33>: J4.G36(G<36>)
FMC_PRSNT_M2C_L: J4.H2(H<2>)
FMC_PWR_GOOD_FLASH_RST_B: J4.D1(D<1>)
FMC_TCK_BUF: J4.D29(D<29>)
FMC_TDO: J4.D31(D<31>)
FMC_TMS_BUF: J4.D33(D<33>)
FPGA_TDO: J4.D30(D<30>)
FRAME: J3.9 J3.10
GA0: J4.C34(C<34>)
GA1: J4.D35(D<35>)
GBTCLK0_M2C: J4.D4(D<4>)
GBTCLK0_M2C*: J4.D5(D<5>)
HDMI_POWER_ENABLE1: IC4.2(A)
HDMI_POWER_ENABLE2: IC6.2(A)
IN<0>: PX5.1(A) R2_4.1(A<0>)
IN<1>: PX4.1(A) R2_3.1(A<0>)
IN<2>: PX3.1(A) R2_2.1(A<0>)
IN<3>: PX2.1(A) R2_1.1(A<0>)
M5V: C1_1.1(A<0>) C1_2.1(A<0>) C1_3.1(A<0>) C1_4.1(A<0>) C6_1.2(B<0>) C6_2.2(B<0>) C6_3.2(B<0>) C6_4.2(B<0>) C9_1.2(B<0>) C9_2.2(B<0>) C9_3.2(B<0>) C9_4.2(B<0>) D1_1.1(A) D1_2.1(A) D1_3.1(A) D1_4.1(A) IC2.11(V-) IC2_1.6(VEE<0>) IC2_1.15(VEE<1>) IC2_2.6(VEE<0>) IC2_2.15(VEE<1>) IC2_3.6(VEE<0>) IC2_3.15(VEE<1>) IC2_4.6(VEE<0>) IC2_4.15(VEE<1>)
SCL: IC1.14(SCL) IC7.6(SCL) J4.C30(C<30>)
SDA: IC1.13(SDA) IC7.5(SDA) J4.C31(C<31>)
SPARE1: J1.10(A<9>) TP11.1(A<0>) U1.9(IN)
SPARE1*: J1.12(A<11>) TP12.1(A<0>) U1.10(IN)
SPARE2: J2.10(A<9>) U3.9(IN)
SPARE2*: J2.12(A<11>) U3.10(IN)
TRIG0: J3.8(A<7>) U2.1(IN)
TRIG0*: J3.7(A<6>) U2.2(IN)
TRIG1: IC3.1(I/O11) IC3.3(I/O12) J1.15(A<14>)
TRIG1*: IC3.4(I/O22) IC3.6(I/O21) J1.16(A<15>)
TRIG2: IC5.1(I/O11) IC5.3(I/O12) J2.15(A<14>)
TRIG2*: IC5.4(I/O22) IC5.6(I/O21) J2.16(A<15>)
TRST_L: J4.D34(D<34>)
UNNAMED_1_24AA025E48_I8_A0: IC7.1(A0)
UNNAMED_1_24AA025E48_I8_A1: IC7.2(A1)
UNNAMED_1_24AA025E48_I8_A2: IC7.3(A2)
UNNAMED_1_AD5665R_I63_VOUTA: IC1.4(VOUTA) IC2.3(PIN<0>)
UNNAMED_1_AD5665R_I63_VOUTB: IC1.11(VOUTB) IC2.12(PIN<0>)
UNNAMED_1_AD5665R_I63_VOUTC: IC1.5(VOUTC) IC2.5(PIN<0>)
UNNAMED_1_AD5665R_I63_VOUTD: IC1.10(VOUTD) IC2.10(PIN<0>)
UNNAMED_1_CAPCERSMDCL2_I78_B_1: C2_1.2(B<0>) IC2_1.11(IN+<0>) R5_1.2(B<0>) TP1_1.1(A<0>)
UNNAMED_1_CAPCERSMDCL2_I78_B_2: C2_2.2(B<0>) IC2_2.11(IN+<0>) R5_2.2(B<0>) TP1_2.1(A<0>)
UNNAMED_1_CAPCERSMDCL2_I78_B_3: C2_3.2(B<0>) IC2_3.11(IN+<0>) R5_3.2(B<0>) TP1_3.1(A<0>)
UNNAMED_1_CAPCERSMDCL2_I78_B_4: C2_4.2(B<0>) IC2_4.11(IN+<0>) R5_4.2(B<0>) TP1_4.1(A<0>)
UNNAMED_1_DELAYLINEGL2L_I14_1_1: IC1_1.15(A2) R1_1.2(B<0>)
UNNAMED_1_DELAYLINEGL2L_I14_1_2: IC1_2.15(A2) R1_2.2(B<0>)
UNNAMED_1_DELAYLINEGL2L_I14_1_3: IC1_3.15(A2) R1_3.2(B<0>)
UNNAMED_1_DELAYLINEGL2L_I14_1_4: IC1_4.15(A2) R1_4.2(B<0>)
UNNAMED_1_DELAYLINEGL2L_I14_2_1: IC1_1.10(B2) R4_1.2(B<0>)
UNNAMED_1_DELAYLINEGL2L_I14_2_2: IC1_2.10(B2) R4_2.2(B<0>)
UNNAMED_1_DELAYLINEGL2L_I14_2_3: IC1_3.10(B2) R4_3.2(B<0>)
UNNAMED_1_DELAYLINEGL2L_I14_2_4: IC1_4.10(B2) R4_4.2(B<0>)
UNNAMED_1_DELAYLINEGL2L_I140__1: D1_1.3(AC) IC1_1.2(A1) IC2_1.12(IN-<0>) R2_1.2(B<0>) R3_1.1(A<0>)
UNNAMED_1_DELAYLINEGL2L_I140__2: D1_2.3(AC) IC1_2.2(A1) IC2_2.12(IN-<0>) R2_2.2(B<0>) R3_2.1(A<0>)
UNNAMED_1_DELAYLINEGL2L_I140__3: D1_3.3(AC) IC1_3.2(A1) IC2_3.12(IN-<0>) R2_3.2(B<0>) R3_3.1(A<0>)
UNNAMED_1_DELAYLINEGL2L_I140__4: D1_4.3(AC) IC1_4.2(A1) IC2_4.12(IN-<0>) R2_4.2(B<0>) R3_4.1(A<0>)
UNNAMED_1_MAX9601_I1_HYS_1: IC2_1.8(HYS<0>) R10_1.2(B<0>)
UNNAMED_1_MAX9601_I1_HYS_2: IC2_2.8(HYS<0>) R10_2.2(B<0>)
UNNAMED_1_MAX9601_I1_HYS_3: IC2_3.8(HYS<0>) R10_3.2(B<0>)
UNNAMED_1_MAX9601_I1_HYS_4: IC2_4.8(HYS<0>) R10_4.2(B<0>)
UNNAMED_1_MAX9601_I1_IN_1: IC2_1.10(IN+<0>) R3_1.2(B<0>) R7_1.2(B<0>)
UNNAMED_1_MAX9601_I1_IN_1_1: IC1_1.7(B1) IC2_1.9(IN-<0>) R6_1.2(B<0>) R8_1.2(B<0>)
UNNAMED_1_MAX9601_I1_IN_1_2: IC1_2.7(B1) IC2_2.9(IN-<0>) R6_2.2(B<0>) R8_2.2(B<0>)
UNNAMED_1_MAX9601_I1_IN_1_3: IC1_3.7(B1) IC2_3.9(IN-<0>) R6_3.2(B<0>) R8_3.2(B<0>)
UNNAMED_1_MAX9601_I1_IN_1_4: IC1_4.7(B1) IC2_4.9(IN-<0>) R6_4.2(B<0>) R8_4.2(B<0>)
UNNAMED_1_MAX9601_I1_IN_2: IC2_2.10(IN+<0>) R3_2.2(B<0>) R7_2.2(B<0>)
UNNAMED_1_MAX9601_I1_IN_3: IC2_3.10(IN+<0>) R3_3.2(B<0>) R7_3.2(B<0>)
UNNAMED_1_MAX9601_I1_IN_4: IC2_4.10(IN+<0>) R3_4.2(B<0>) R7_4.2(B<0>)
UNNAMED_1_MAX9601_I1_Q_1: IC2_1.2(Q*<0>) IC3_1.10(B2) R12_1.2(B<0>) TP6_1.1(A<0>)
UNNAMED_1_MAX9601_I1_Q_1_1: IC2_1.1(Q<0>) IC3_1.7(B1) R14_1.2(B<0>) TP5_1.1(A<0>)
UNNAMED_1_MAX9601_I1_Q_1_2: IC2_2.1(Q<0>) IC3_2.7(B1) R14_2.2(B<0>) TP5_2.1(A<0>)
UNNAMED_1_MAX9601_I1_Q_1_3: IC2_3.1(Q<0>) IC3_3.7(B1) R14_3.2(B<0>) TP5_3.1(A<0>)
UNNAMED_1_MAX9601_I1_Q_1_4: IC2_4.1(Q<0>) IC3_4.7(B1) R14_4.2(B<0>) TP5_4.1(A<0>)
UNNAMED_1_MAX9601_I1_Q_2: IC2_2.2(Q*<0>) IC3_2.10(B2) R12_2.2(B<0>) TP6_2.1(A<0>)
UNNAMED_1_MAX9601_I1_Q_3: IC2_3.2(Q*<0>) IC3_3.10(B2) R12_3.2(B<0>) TP6_3.1(A<0>)
UNNAMED_1_MAX9601_I1_Q_4: IC2_4.2(Q*<0>) IC3_4.10(B2) R12_4.2(B<0>) TP6_4.1(A<0>)
UNNAMED_1_MAX9601_I71_HYS_1: IC2_1.13(HYS<0>) R9_1.2(B<0>)
UNNAMED_1_MAX9601_I71_HYS_2: IC2_2.13(HYS<0>) R9_2.2(B<0>)
UNNAMED_1_MAX9601_I71_HYS_3: IC2_3.13(HYS<0>) R9_3.2(B<0>)
UNNAMED_1_MAX9601_I71_HYS_4: IC2_4.13(HYS<0>) R9_4.2(B<0>)
UNNAMED_1_OPA4277_I22_MIN: IC2.2(MIN<0>)
UNNAMED_1_OPA4277_I22_MIN_1: IC2.9(MIN<0>)
UNNAMED_1_OPA4277_I22_MIN_2: IC2.6(MIN<0>)
UNNAMED_1_OPA4277_I22_MIN_3: IC2.13(MIN<0>)
UNNAMED_1_PC036AFMCLPCCONNECT_1: J4.H5(H<5>) PX1.2(B)
UNNAMED_1_PC036AFMCLPCCONNECTOR: J4.H4(H<4>) PX1.1(A)
UNNAMED_4_74LVC1G07_I28_Y: IC4.4(Y) T1.1(G)
UNNAMED_4_74LVC1G07_I40_Y: IC6.4(Y) T2.1(G)
UNNAMED_4_CON19P_I2_A: J1.14(A<13>) T1.2(S)
UNNAMED_4_CON19P_I3_A: J2.14(A<13>) T2.2(S)
VREF: IC1.7(VREFIN/VREFOUT)
VREF_A_M2C: J4.H1(H<1>)
VTHRESH<0>: IC2.1(OUT<0>) R5_4.1(A<0>)
VTHRESH<1>: IC2.14(OUT<0>) R5_3.1(A<0>)
VTHRESH<2>: IC2.7(OUT<0>) R5_2.1(A<0>)
VTHRESH<3>: IC2.8(OUT<0>) R5_1.1(A<0>)

Pads without a net: IC4 1; IC6 1; IC7 7; J1 13 18 19; J2 13 18 19

## Via types
v1: diameter 0.914, hole 0.406, TOP to BOTTOM, 204 vias
v2: diameter 0.6, hole 0.3, TOP to BOTTOM, 16 vias
v3: diameter 0.61, hole 0.33, TOP to BOTTOM, 8 vias

## Routing (per net, layer and track width the routed paths; a pad name or vN(x,y) marks a point on that pad's centre or on a via; arc(x,y) is an arc through that point)
GND_SIGNAL: length 269.8
  TOP w0.17: v2(47.62,55.29) 47.67,55.29 47.68,55.3 U2.3 49.35,55.3 49.36,55.31 v2(49.48,55.31) ; v2(28.32,65.4) U3.3 v2(26.5,65.4) ; IC3.2 v2(18.44,65.2) ; v2(11.24,65.36) U1.3 v2(9.4,65.36) ; IC5.2 v2(35.4,65.18)
  TOP w0.4: v1(90.05,46.71) 90.05,46.6 90.03,46.59 IC1_2.5 ; IC1_2.8 93.84,46.59 93.85,46.6 v1(93.85,46.71) ; R7_1.1 72.65,43.5 72.95,43.8 v1(73.03,43.8) ; IC2_3.17 v1(105.45,38.15) ; IC3_2.16 83.84,23.95 83.8,24 v1(83.59,24) ; IC2_2.17 v1(86.45,38.15) ; IC1_3.13 107.77,54.09 107.55,54.3 v1(107.55,54.31) ; 123,30.3 v1(124.41,30.3) ; 130.6,30.3 v1(129.19,30.3) ; IC3_1.3 v1(75.01,26.49) ; IC1_1.16 v1(65.95,51.49) ; R11_1.1 v1(60.75,36.2) ; IC1_4.5 128.03,46.59 128.05,46.6 v1(128.05,46.71) ; v1(91.3,51.49) 91.3,52.9 IC1_2.11 91.31,54.45 R4_2.1 ; v1(93.85,54.31) 93.85,54.2 93.84,54.2 IC1_2.9 ; R14_2.1 94.01,29.86 v1(94.01,29.1) 93.75,29.1 93.69,29.03 IC3_2.5 ; v1(94.01,24) 93.8,24 93.75,23.95 IC3_2.1 ; R9_2.1 v1(80.36,41) ; R6_1.1 v1(77.65,41.4) ; C6_4.1 v1(118.67,39.5) ; v1(109.2,54.31) 109.2,54.3 109.03,54.13 IC1_3.12 ; R7_3.1 110.65,43.5 110.95,43.8 v1(111.03,43.8) ; v1(67.41,32.8) 67.15,32.8 67.11,32.84 IC3_1.9 ; v1(91.3,46.71) 91.3,46.7 91.31,46.7 IC1_2.6 ; R7_2.1 91.65,43.5 91.95,43.8 v1(92.03,43.8) ; v3(105.39,29.03) IC3_3.12 v1(102.48,29.03) 102.48,29.91 R12_3.1 ; R7_4.1 129.65,43.5 129.95,43.8 v1(130.03,43.8) ; v1(87.4,51.49) 87.4,51.5 87.5,51.59 IC1_2.14 87.5,54.45 R1_2.1 ; v1(128.2,54.31) 128.2,54.3 128.03,54.13 IC1_4.12 ; IC3_4.1 131.75,23.95 131.8,24 v1(132.01,24) ; IC1_1.8 74.84,46.59 74.85,46.6 v1(74.85,46.71) ; IC3_2.13 v1(86.41,27.77) ; R11_4.1 v1(117.75,36.2) ; IC3_3.8 v1(110.19,32.84) ; IC3_3.13 v1(105.41,27.77) ; IC3_1.1 74.75,23.95 74.8,24 v1(75.01,24) ; IC3_2.3 v1(94.01,26.49) ; 104,30.3 v1(105.41,30.3) ; IC3_1.4 v1(72.19,27.77) ; IC3_3.5 112.69,29.03 112.75,29.1 v1(113.01,29.1) 113.01,29.86 R14_3.1 ; C6_2.1 v1(80.67,39.5) ; R1_1.1 68.5,54.45 IC1_1.14 68.5,51.59 68.4,51.5 v1(68.4,51.49) ; C2_4.1 v1(118.36,42.6) ; IC3_3.9 105.11,32.84 105.15,32.8 v1(105.41,32.8) ; v1(87.5,46.71) 87.5,46.6 87.5,46.59 IC1_2.3 ; IC2_3.4 108.68,38.15 108.43,37.9 v1(108.3,37.9) ; IC1_3.5 109.03,46.59 109.05,46.6 v1(109.05,46.71) ; v1(71.2,54.31) 71.2,54.3 71.03,54.13 IC1_1.12 ; C2_2.1 v1(80.36,42.6) ; IC3_3.16 102.84,23.95 102.8,24 v1(102.59,24) ; v1(86.41,32.8) 86.15,32.8 86.11,32.84 IC3_2.9 ; IC3_3.14 v1(102.59,26.49) ; IC1_1.6 72.31,46.7 72.3,46.7 v1(72.3,46.71) ; IC2_2.4 89.68,38.15 89.43,37.9 v1(89.3,37.9) ; 81.5,34.6 v1(81.5,33.4) ; IC3_4.9 124.11,32.84 124.15,32.8 v1(124.41,32.8) ; v1(64.59,24) 64.8,24 64.84,23.95 IC3_1.16 ; v1(96.8,35.1) 96.8,36.01 96.75,36.06 R10_2.1 ; C5_1.1 v1(76.15,36.1) ; IC3_4.14 v1(121.59,26.49) ; IC2_4.4 127.68,38.15 127.43,37.9 v1(127.3,37.9) ; IC1_1.5 71.03,46.59 71.05,46.6 v1(71.05,46.71) ; v1(70.3,37.9) 70.43,37.9 70.68,38.15 IC2_1.4 ; v3(124.39,29.03) IC3_4.12 v1(121.48,29.03) 121.48,29.91 R12_4.1 ; R8_2.1 v1(96.5,39.5) ; C6_3.1 v1(99.67,39.5) ; IC1_3.3 106.5,46.59 106.5,46.6 v1(106.5,46.71) ; IC3_2.8 v1(91.19,32.84) ; IC1_4.13 126.77,54.09 126.55,54.3 v1(126.55,54.31) ; IC3_2.4 v1(91.19,27.77) ; v1(121.59,24) 121.8,24 121.84,23.95 IC3_4.16 ; R1_4.1 125.5,54.45 IC1_4.14 125.5,51.59 125.4,51.5 v1(125.4,51.49) ; v1(74.85,54.31) 74.85,54.2 74.84,54.2 IC1_1.9 ; R14_4.1 132.01,29.86 v1(132.01,29.1) 131.75,29.1 131.69,29.03 IC3_4.5 ; v1(125.5,46.71) 125.5,46.6 125.5,46.59 IC1_4.3 ; v1(110.3,46.71) 110.3,46.7 110.31,46.7 IC1_3.6 ; C6_1.1 v1(61.66,39.5) ; IC3_2.14 v1(83.59,26.49) ; IC2_1.17 v1(67.45,38.15) ; R8_3.1 v1(115.5,39.5) ; R1_3.1 106.5,54.45 IC1_3.14 106.5,51.59 106.4,51.5 v1(106.4,51.49) ; C2_3.1 v1(99.36,42.6) ; IC1_4.1 v1(122.95,46.71) ; R11_2.1 v1(79.75,36.2) ; IC1_4.9 131.84,54.2 131.85,54.2 v1(131.85,54.31) ; v1(72.3,51.49) 72.3,52.9 IC1_1.11 72.31,54.45 R4_1.1 ; IC1_3.1 v1(103.95,46.71) ; IC3_1.13 v1(67.41,27.77) ; IC3_4.3 v1(132.01,26.49) ; IC1_2.4 v1(88.77,46.71) ; 73.6,30.3 v1(72.19,30.3) ; IC1_3.9 112.84,54.2 112.85,54.2 v1(112.85,54.31) ; IC3_3.4 v1(110.19,27.77) ; R12_2.1 83.48,29.91 v1(83.48,29.03) IC3_2.12 v3(86.39,29.03) ; R6_4.1 v1(134.65,41.4) ; IC1_4.8 131.84,46.59 131.85,46.6 v1(131.85,46.71) ; R14_1.1 75.01,29.86 v1(75.01,29.1) 74.75,29.1 74.69,29.03 IC3_1.5 ; IC1_2.12 90.03,54.13 90.2,54.3 v1(90.2,54.31) ; C2_1.1 v1(61.37,42.6) ; IC1_2.13 88.77,54.09 88.55,54.3 v1(88.55,54.31) ; IC3_1.8 v1(72.19,32.84) ; R8_1.1 v1(77.5,39.5) ; C3_4.1 v1(134.95,27.66) ; C5_3.1 v1(114.15,36.1) ; R6_3.1 v1(115.65,41.4) ; C8_3.1 v1(99.36,37.8) ; R8_4.1 v1(134.5,39.5) ; v1(110.3,51.49) 110.3,52.9 IC1_3.11 110.31,54.45 R4_3.1 ; 66,30.3 v1(67.41,30.3) ; 100.5,34.6 v1(100.5,33.4) ; C4_4.1 v1(131.8,33.8) ; v1(69.55,54.31) 69.55,54.3 69.77,54.09 IC1_1.13 ; IC1_4.16 v1(122.95,51.49) ; R10_1.1 77.75,36.06 77.8,36.01 v1(77.8,35.1) ; C4_2.1 v1(93.8,33.8) ; C8_4.1 v1(118.36,37.8) ; v1(134.8,35.1) 134.8,36.01 134.75,36.06 R10_4.1 ; IC3_4.4 v1(129.19,27.77) ; v1(68.5,46.71) 68.5,46.6 68.5,46.59 IC1_1.3 ; IC1_4.6 129.31,46.7 129.3,46.7 v1(129.3,46.71) ; 92.6,30.3 v1(91.19,30.3) ; C8_1.1 v1(61.37,37.8) ; IC3_4.8 v1(129.19,32.84) ; IC1_2.1 v1(84.95,46.71) ; R9_1.1 v1(61.37,41) ; IC1_1.4 v1(69.77,46.71) ; 119.5,34.6 v1(119.5,33.4) ; C4_3.1 v1(112.8,33.8) ; v1(112.85,46.71) 112.85,46.6 112.84,46.59 IC1_3.8 ; IC1_3.4 v1(107.77,46.71) ; IC1_1.1 v1(65.95,46.71) ; C4_1.1 v1(74.8,33.8) ; C5_2.1 v1(95.15,36.1) ; R9_4.1 v1(118.36,41) ; C8_2.1 v1(80.36,37.8) ; v1(115.8,35.1) 115.8,36.01 115.75,36.06 R10_3.1 ; 62.5,34.6 v1(62.5,33.4) ; R12_1.1 64.48,29.91 v1(64.48,29.03) IC3_1.12 v3(67.39,29.03) ; R9_3.1 v1(99.36,41) ; 111.6,30.3 v1(110.19,30.3) ; v1(113.01,24) 112.8,24 112.75,23.95 IC3_3.1 ; C3_2.1 v1(96.95,27.66) ; IC3_1.14 v1(64.59,26.49) ; IC1_4.4 v1(126.77,46.71) ; IC3_4.13 v1(124.41,27.77) ; R4_4.1 129.31,54.45 IC1_4.11 129.3,52.9 v1(129.3,51.49) ; C5_4.1 v1(133.15,36.1) ; R6_2.1 v1(96.65,41.4) ; IC2_4.17 v1(124.45,38.15) ; R11_3.1 v1(98.75,36.2) ; C3_3.1 v1(115.95,27.66) ; 85,30.3 v1(86.41,30.3) ; IC3_3.3 v1(113.01,26.49) ; IC1_3.16 v1(103.95,51.49) ; C3_1.1 v1(77.95,27.66) ; IC1_2.16 v1(84.95,51.49)
  BOTTOM w0.17: C16.1 28.32,64.73 v2(28.32,65.4) ; v2(49.48,55.31) 50.06,54.73 C15.1 ; C14.1 11.69,64.29 11.69,64.91 v2(11.24,65.36)
  BOTTOM w0.4: v1(111.27,42.68) 110.64,42.05 C7_3.1 ; C9_1.1 70.9,37.25 70.3,37.85 v1(70.3,37.9) ; C10_3.1 104.15,42.83 103.78,43.2 v1(103.6,43.2) ; v1(108.3,37.9) 108.3,37.85 108.9,37.25 C9_3.1 ; C10_1.1 66.15,42.83 65.78,43.2 v1(65.6,43.2) ; C10_4.1 123.15,42.83 122.78,43.2 v1(122.6,43.2) ; C9_2.1 89.9,37.25 89.3,37.85 v1(89.3,37.9) ; v1(130.27,42.68) 129.64,42.05 C7_4.1 ; C7_1.1 72.64,42.05 v1(73.27,42.68) ; C10_2.1 85.15,42.83 84.78,43.2 v1(84.6,43.2) ; C7_2.1 91.64,42.05 v1(92.27,42.68) ; C9_4.1 127.9,37.25 127.3,37.85 v1(127.3,37.9)
P2V5: length 68.4
  TOP w0.17: v2(15.41,65.36) U1.8 13.71,65.36 v2(13.69,65.37) ; IC5.5 v2(38.12,65.18) ; v2(51.92,55.33) 52,55.33 52.03,55.3 U2.8 v2(53.78,55.3) ; v2(32.6,65.4) U3.8 v2(30.76,65.4) ; IC3.5 v2(21.2,65.2)
  TOP w0.2: v1(73.4,37.4) 73.15,37.65 73.15,38.36 72.71,38.8 IC2_1.5 ; 120.95,37.85 121.4,38.3 121.65,38.3 122.15,38.8 IC2_4.16 ; IC2_3.16 103.15,38.8 102.65,38.3 102.4,38.3 101.95,37.85 ; IC2_1.16 65.15,38.8 64.65,38.3 64.4,38.3 63.95,37.85 ; v1(92.4,37.4) 92.15,37.65 92.15,38.36 91.71,38.8 IC2_2.5 ; v1(111.4,37.4) 111.15,37.65 111.15,38.36 110.71,38.8 IC2_3.5 ; 82.95,37.85 83.4,38.3 83.65,38.3 84.15,38.8 IC2_2.16 ; v1(130.4,37.4) 130.15,37.65 130.15,38.36 129.71,38.8 IC2_4.5
  TOP w0.4: v1(77.95,31.34) C3_1.2 ; 82.95,37.85 C8_2.2 83.25,37.5 IC2_2.18 85.86,37.5 85.95,37.41 86,37.41 86.14,37.27 86.15,37.27 86.52,36.9 v1(86.6,36.9) ; v1(134.95,31.34) C3_4.2 ; C5_3.2 v1(111.4,37.4) 111.12,37.4 111.02,37.5 IC2_3.3 ; C5_1.2 v1(73.4,37.4) 73.12,37.4 73.02,37.5 IC2_1.3 ; 120.95,37.85 C8_4.2 121.25,37.5 IC2_4.18 123.86,37.5 123.95,37.41 124,37.41 124.14,37.27 124.15,37.27 124.52,36.9 v1(124.6,36.9) ; v1(115.95,31.34) C3_3.2 ; IC2_4.3 130.02,37.5 130.12,37.4 v1(130.4,37.4) C5_4.2 ; 63.95,37.85 C8_1.2 64.25,37.5 IC2_1.18 66.86,37.5 66.95,37.41 67,37.41 67.14,37.27 67.15,37.27 67.52,36.9 v1(67.6,36.9) ; v1(96.95,31.34) C3_2.2 ; IC2_2.3 92.02,37.5 92.12,37.4 v1(92.4,37.4) C5_2.2 ; v1(105.6,36.9) 105.52,36.9 105.15,37.27 105.14,37.27 105,37.41 104.95,37.41 104.86,37.5 IC2_3.18 102.25,37.5 C8_3.2 101.95,37.85
  BOTTOM w0.17: C15.2 51.56,54.96 v2(51.92,55.33) ; C16.2 30.76,64.89 v2(30.76,65.4) ; v2(13.69,65.37) 13.4,65.37 13.14,65.11 13.14,64.3 C14.2
  BOTTOM w0.4: 130.6,29.1 v3(129.2,29.1) ; 92.6,29.1 v3(91.2,29.1) ; 73.6,29.1 v3(72.2,29.1) ; 111.6,29.1 v3(110.2,29.1)
P5V: length 42.1
  TOP w0.4: v1(67.55,40.47) 67.34,40.26 67.24,40.26 67.08,40.1 IC2_1.14 ; C4_1.2 v1(78.35,33.8) ; IC2_4.7 127.68,40.1 v1(127.4,40.38) ; IC2_3.7 108.68,40.1 v1(108.4,40.38) ; v1(70.85,57.9) 70.8,57.95 C1_1.2 69.4,58.15 D1_1.2 ; IC2_2.7 89.68,40.1 v1(89.4,40.38) ; C4_2.2 v1(97.35,33.8) ; v1(108.85,57.9) 108.8,57.95 C1_3.2 107.4,58.15 D1_3.2 ; C4_3.2 v1(116.35,33.8) ; v1(89.85,57.9) 89.8,57.95 C1_2.2 88.4,58.15 D1_2.2 ; IC2_3.14 105.08,40.1 105.24,40.26 105.34,40.26 v1(105.55,40.47) ; v1(127.85,57.9) 127.8,57.95 C1_4.2 126.4,58.15 D1_4.2 ; IC2_1.7 70.68,40.1 v1(70.4,40.38) ; v1(86.55,40.47) 86.34,40.26 86.24,40.26 86.08,40.1 IC2_2.14 ; IC2_4.14 124.08,40.1 124.24,40.26 124.34,40.26 v1(124.55,40.47) ; C4_4.2 v1(135.35,33.8)
  BOTTOM w0.4: C7_2.2 90.55,40.8 90.05,40.8 89.63,40.38 v1(89.4,40.38) ; v1(108.4,40.38) 108.63,40.38 109.05,40.8 109.55,40.8 C7_3.2 ; C10_3.2 104.23,40.47 v1(105.55,40.47) ; v1(67.55,40.47) 66.23,40.47 C10_1.2 ; C10_2.2 85.23,40.47 v1(86.55,40.47) ; C7_4.2 128.55,40.8 128.05,40.8 127.63,40.38 v1(127.4,40.38) ; v1(124.55,40.47) 123.23,40.47 C10_4.2 ; v1(70.4,40.38) 70.63,40.38 71.05,40.8 71.55,40.8 C7_1.2
BEAM_TRIGGER*<0>: length 9.3
  TOP w0.2: R11_4.2 120.25,35.03 120.27,35.01 120.27,33.81 120.33,33.75 120.33,33.05
  TOP w0.4: 118.7,30.55 TP3_4.1 118.7,31.3 120.33,32.94 120.33,33.05 ; R11_4.2 121.05,36.2 121.7,36.85 IC2_4.19
BEAM_TRIGGER*<1>: length 9.3
  TOP w0.2: R11_3.2 101.25,35.03 101.27,35.01 101.27,33.81 101.33,33.75 101.33,33.05
  TOP w0.4: 99.7,30.55 TP3_3.1 99.7,31.3 101.33,32.94 101.33,33.05 ; IC2_3.19 102.7,36.85 102.05,36.2 R11_3.2
BEAM_TRIGGER*<2>: length 9.3
  TOP w0.2: 82.33,33.05 82.33,33.75 82.27,33.81 82.27,35.01 82.25,35.03 R11_2.2
  TOP w0.4: 82.33,33.05 82.33,32.94 80.7,31.3 TP3_2.1 80.7,30.55 ; R11_2.2 83.05,36.2 83.7,36.85 IC2_2.19
BEAM_TRIGGER*<3>: length 9.3
  TOP w0.2: 63.34,33.05 63.34,33.75 63.27,33.81 63.27,35.01 63.25,35.03 R11_1.2
  TOP w0.4: IC2_1.19 64.7,36.85 64.05,36.2 R11_1.2 ; 61.7,30.55 TP3_1.1 61.7,31.3 63.34,32.94 63.34,33.05
BEAM_TRIGGER<0>: length 7.7
  TOP w0.2: 120.15,31.9 121.05,32.8 R13_4.2 122.4,34.4 TP2_4.1 122.5,35.74 IC2_4.20
  TOP w0.4: 120.15,31.9 120.15,30.5
BEAM_TRIGGER<1>: length 7.7
  TOP w0.2: IC2_3.20 103.5,35.74 TP2_3.1 103.4,34.4 R13_3.2 102.05,32.8 101.15,31.9
  TOP w0.4: 101.15,31.9 101.15,30.5
BEAM_TRIGGER<2>: length 7.7
  TOP w0.2: 82.15,31.9 83.05,32.8 R13_2.2 84.4,34.4 TP2_2.1 84.5,35.74 IC2_2.20
  TOP w0.4: 82.15,31.9 82.15,30.5
BEAM_TRIGGER<3>: length 7.7
  TOP w0.2: 63.15,31.9 64.05,32.8 R13_1.2 65.4,34.4 TP2_1.1 65.5,35.74 IC2_1.20
  TOP w0.4: 63.15,31.9 63.15,30.5
BEAM_TRIGGER_CFD*<0>: length 6.6
  TOP w0.4: 126.15,21.45 126.15,24.6 125.53,25.23 IC3_4.15
BEAM_TRIGGER_CFD*<1>: length 6.6
  TOP w0.4: 107.15,21.45 107.15,24.6 106.53,25.23 IC3_3.15
BEAM_TRIGGER_CFD*<2>: length 6.6
  TOP w0.4: IC3_2.15 87.53,25.23 88.15,24.6 88.15,21.45
BEAM_TRIGGER_CFD*<3>: length 6.6
  TOP w0.4: IC3_1.15 68.53,25.23 69.15,24.6 69.15,21.45
BEAM_TRIGGER_CFD<0>: length 7
  TOP w0.4: IC3_4.2 127.58,25.23 126.95,24.6 126.95,21.5
BEAM_TRIGGER_CFD<1>: length 7
  TOP w0.4: 107.95,21.5 107.95,24.6 108.58,25.23 IC3_3.2
BEAM_TRIGGER_CFD<2>: length 7
  TOP w0.4: IC3_2.2 89.58,25.23 88.95,24.6 88.95,21.5
BEAM_TRIGGER_CFD<3>: length 7
  TOP w0.4: 69.95,21.5 69.95,24.6 70.58,25.23 IC3_1.2
BUSY0: length 24
  TOP w0.17: J3.6 50.02,59.55 50.02,55.08 49.7,54.77 49.3,54.77 49.26,54.8 U2.4
  TOP w0.25: 41.37,43.06 41.37,49.03 41.85,49.51 47.04,54.7 47.87,54.7 47.96,54.8 U2.4
BUSY0*: length 27.6
  TOP w0.17: U2.5 49.82,54.3 50.38,54.86 50.38,59.79 49.51,60.66 49.51,61.8 50.76,63.05 51.44,63.05 J3.3
  TOP w0.25: 41.82,43.06 41.82,48.8 47.27,54.26 48.05,54.26 48.1,54.3 U2.5
BUSY1: length 11.4
  TOP w0.17: J1.7 13.55,67.7 12.82,66.97 12.82,64.89 13.35,64.36 U1.6
  TOP w0.25: U1.6 14.64,64.27 14.64,59.49
BUSY1*: length 12.2
  TOP w0.17: J1.9 14.35,67.93 13.15,66.73 13.15,65.15 13.47,64.83 13.92,64.83 13.95,64.86 U1.7
  TOP w0.25: U1.7 14.98,64.86 15.1,64.75 15.17,64.75 15.34,64.58 15.34,64.14 15.1,63.91 15.1,59.49
BUSY2: length 13
  TOP w0.17: J2.7 30.55,67.7 29.85,67 29.85,65.06 30.51,64.4 U3.6
  TOP w0.25: U3.6 32.02,64.03 32.02,58
BUSY2*: length 13.6
  TOP w0.17: U3.7 31.03,64.9 30.99,64.86 30.52,64.86 30.21,65.16 30.21,65.38 30.2,65.4 30.2,66.79 31.35,67.93 J2.9
  TOP w0.25: 32.47,58 32.47,64.58 32.15,64.9 U3.7
CLK1: length 11.8
  TOP w0.17: U1.2 10.96,65.86 11.1,66 11.1,67 11.95,67.85 J1.3
  TOP w0.25: U1.2 9.73,65.86 9.64,65.94 9.16,65.94 8.82,65.6 8.82,59.88 8.8,59.87
CLK1*: length 11.5
  TOP w0.17: U1.1 10.25,66.85 11.15,67.75 J1.1
  TOP w0.25: U1.1 9.86,66.36 9.83,66.39 8.77,66.39 8.35,65.98 8.35,59.76
CLK2: length 15.8
  TOP w0.17: U3.2 28,65.9 28.35,66.25 28.35,67.25 28.95,67.85 J2.3
  TOP w0.25: U3.2 26.83,65.9 26.74,65.98 26.26,65.98 26.22,65.95 25.39,65.95 25.37,65.97 25.12,65.97 24.87,65.72 24.87,62.23 26.98,60.12 26.98,57.7
CLK2*: length 15.6
  TOP w0.17: J2.1 28.15,67.75 28,67.6 28,66.65 27.75,66.4 U3.1
  TOP w0.25: 26.53,57.7 26.53,59.93 24.42,62.04 24.42,65.9 24.93,66.41 25.37,66.41 25.39,66.43 25.98,66.43 26.07,66.44 26.93,66.44 26.96,66.4 U3.1
CONT0: length 34.4
  TOP w0.17: U2.7 52.14,54.8 52.12,54.78 51.43,54.78 51.32,54.89 51.32,60.19 51.93,60.8 51.93,62.07 53.2,63.34 53.2,64.39 52.77,64.82 50.66,64.82 J3.5
  TOP w0.25: 44.55,43.01 44.55,47.97 48.41,51.83 52.14,51.83 53.33,53.02 53.33,53.78 53.63,54.08 53.63,54.52 53.35,54.8 U2.7
CONT0*: length 25.7
  TOP w0.17: J3.4 50.88,54.84 51.4,54.32 51.77,54.32 51.82,54.27 52.11,54.27 52.14,54.3 U2.6
  TOP w0.25: 44.01,43.01 44.01,48.07 48.37,52.43 52.07,52.43 52.85,53.21 U2.6
CONT1: length 11.8
  TOP w0.17: J1.4 12.35,67.75 12,67.4 12,65.33 11.48,64.81 11.03,64.81 10.98,64.86 U1.4
  TOP w0.25: 9.69,59.77 9.69,63.92 9.46,64.14 9.46,64.58 9.75,64.86 U1.4
CONT1*: length 11.4
  TOP w0.17: J1.6 13.15,67.93 12.35,67.14 12.35,65.18 11.53,64.36 U1.5
  TOP w0.25: U1.5 10.25,59.77
CONT2: length 14.7
  TOP w0.17: U3.4 28.06,64.9 28.11,64.86 28.59,64.86 29,65.26 29,67.4 29.35,67.75 J2.4
  TOP w0.25: U3.4 26.85,64.9 26.56,64.61 26.56,62.15 28.49,60.22 28.49,57.53
CONT2*: length 14.5
  TOP w0.17: U3.5 28.64,64.4 29.35,65.11 29.35,67.14 30.15,67.93 J2.6
  TOP w0.25: 28.94,57.53 28.94,60.41 27.01,62.34 27.01,64.06 U3.5
DUT_CLK0: length 27.1
  TOP w0.17: 45.93,42.81 45.93,47.62 48.07,49.76 51.69,49.76 54.8,52.87 54.8,55.15 54.1,55.84 53.55,55.84 53.51,55.8 U2.9 52.83,55.78 52.24,55.78 52.01,56.01 52.01,57.16 53.42,58.57 J3.2
DUT_CLK0*: length 29.4
  TOP w0.17: J3.1 54.69,58.95 52.85,57.11 U2.10 53.34,56.3 53.36,56.32 54.3,56.32 55.27,55.34 55.27,52.68 51.88,49.29 48.26,49.29 46.4,47.43 46.4,42.81
M5V: length 42.2
  TOP w0.4: D1_3.1 107.12,56.25 107.4,56.33 107.52,56.45 C1_3.1 v1(108.8,56.45) ; IC2_1.6 70.68,39.45 v1(70.4,39.17) ; C6_4.2 121,39.45 IC2_4.15 124.23,39.45 124.38,39.3 v1(125.1,39.3) ; IC2_4.6 127.68,39.45 v1(127.4,39.17) ; v1(89.4,39.17) 89.68,39.45 IC2_2.6 ; v1(87.1,39.3) 86.38,39.3 86.23,39.45 IC2_2.15 83,39.45 C6_2.2 ; D1_1.1 69.12,56.25 69.4,56.33 69.52,56.45 C1_1.1 v1(70.8,56.45) ; D1_2.1 88.12,56.25 88.4,56.33 88.52,56.45 C1_2.1 v1(89.8,56.45) ; IC2_3.6 108.68,39.45 v1(108.4,39.17) ; C6_1.2 64,39.45 IC2_1.15 67.23,39.45 67.38,39.3 v1(68.1,39.3) ; C6_3.2 102,39.45 IC2_3.15 105.23,39.45 105.38,39.3 v1(106.1,39.3) ; v1(127.8,56.45) C1_4.1 126.52,56.45 126.4,56.33 126.12,56.25 D1_4.1
  BOTTOM w0.4: v1(89.4,39.17) 89.43,39.17 89.9,38.7 90.75,38.7 C9_2.2 ; v1(70.4,39.17) 70.43,39.17 70.9,38.7 71.75,38.7 C9_1.2 ; C9_3.2 109.75,38.7 108.9,38.7 108.43,39.17 v1(108.4,39.17) ; C9_4.2 128.75,38.7 127.9,38.7 127.43,39.17 v1(127.4,39.17)
SPARE1: length 13.5
  TOP w0.17: U1.9 13.98,65.86 13.92,65.92 13.83,65.92 13.7,66.05 13.7,66.65 14.75,67.7 J1.10
  TOP w0.25: 16.03,58.27 16.03,65.57 15.65,65.94 15.17,65.94 15.08,65.86 U1.9
SPARE1*: length 12.9
  TOP w0.17: U1.10 14.55,66.75 15.55,67.75 J1.12
  TOP w0.25: U1.10 14.95,66.36 14.98,66.39 15.84,66.39 16.48,65.75 16.48,58.27
SPARE2: length 13.5
  TOP w0.17: U3.9 31.03,65.9 30.7,66.23 30.7,66.65 31.75,67.7 J2.10
  TOP w0.25: U3.9 32.27,65.9 32.36,65.98 32.84,65.98 33.18,65.65 33.18,63.63 33.22,63.59 33.22,58.34
SPARE2*: length 12.9
  TOP w0.17: J2.12 32.55,67.75 31.65,66.85 U3.10
  TOP w0.25: 33.67,58.34 33.67,63.77 33.63,63.81 33.63,65.83 33.03,66.44 32.17,66.44 32.14,66.4 U3.10
TRIG0: length 25.3
  TOP w0.16: 46.45,56.27 46.49,56.27 46.55,56.22 47.73,56.22 47.81,56.3 U2.1
  TOP w0.17: U2.1 48.55,56.95 45.8,59.7 J3.8
  TOP w0.25: 38.55,42.99 38.55,49.27 45.56,56.27 46.45,56.27
TRIG0*: length 28
  TOP w0.16: 46.45,55.83 46.49,55.83 46.55,55.88 47.73,55.88 47.81,55.8 U2.2
  TOP w0.17: U2.2 48.65,55.9 49.16,55.9 49.33,56.07 49.33,56.96 47.07,59.22 J3.7
  TOP w0.25: 46.45,55.83 45.74,55.83 39,49.08 39,42.99
TRIG1: length 9.9
  TOP w0.17: J1.15 16.75,67.86 17.55,67.06 IC3.1 ; IC3.3 17.82,64.25 18.55,63.52 18.55,63.04 18.57,63.01 18.57,58.25
